# EAGLE board Lipo_Charger_Basic_Panel_v10 (EAGLE 6.6.0), part 1 of 2
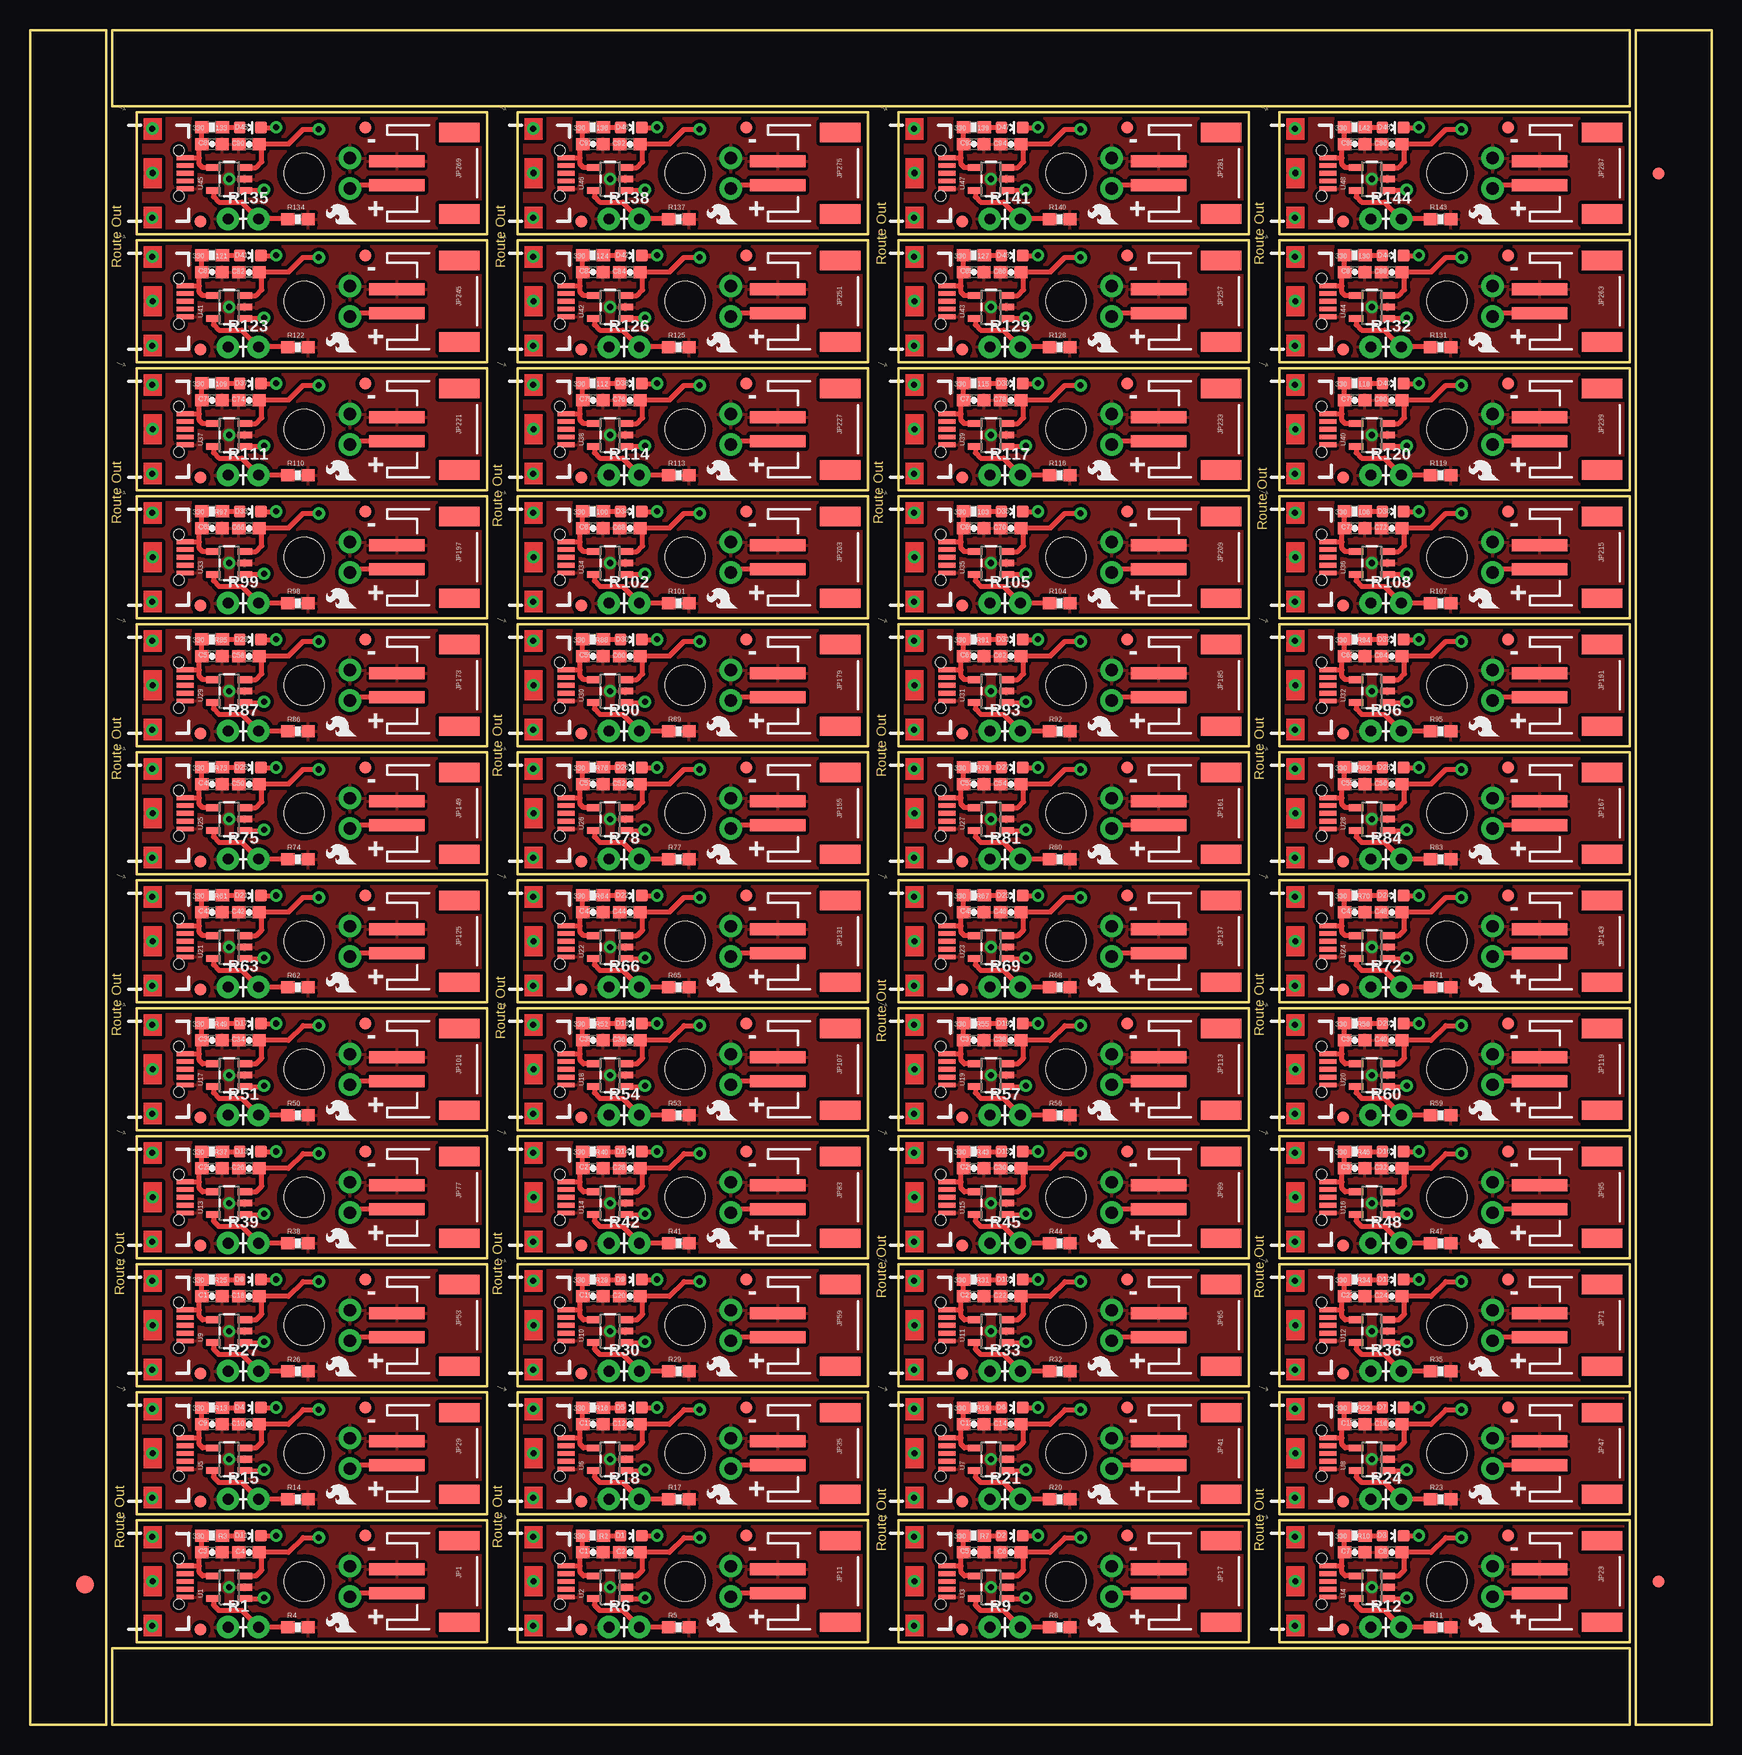
[diagram p0: board, top side]
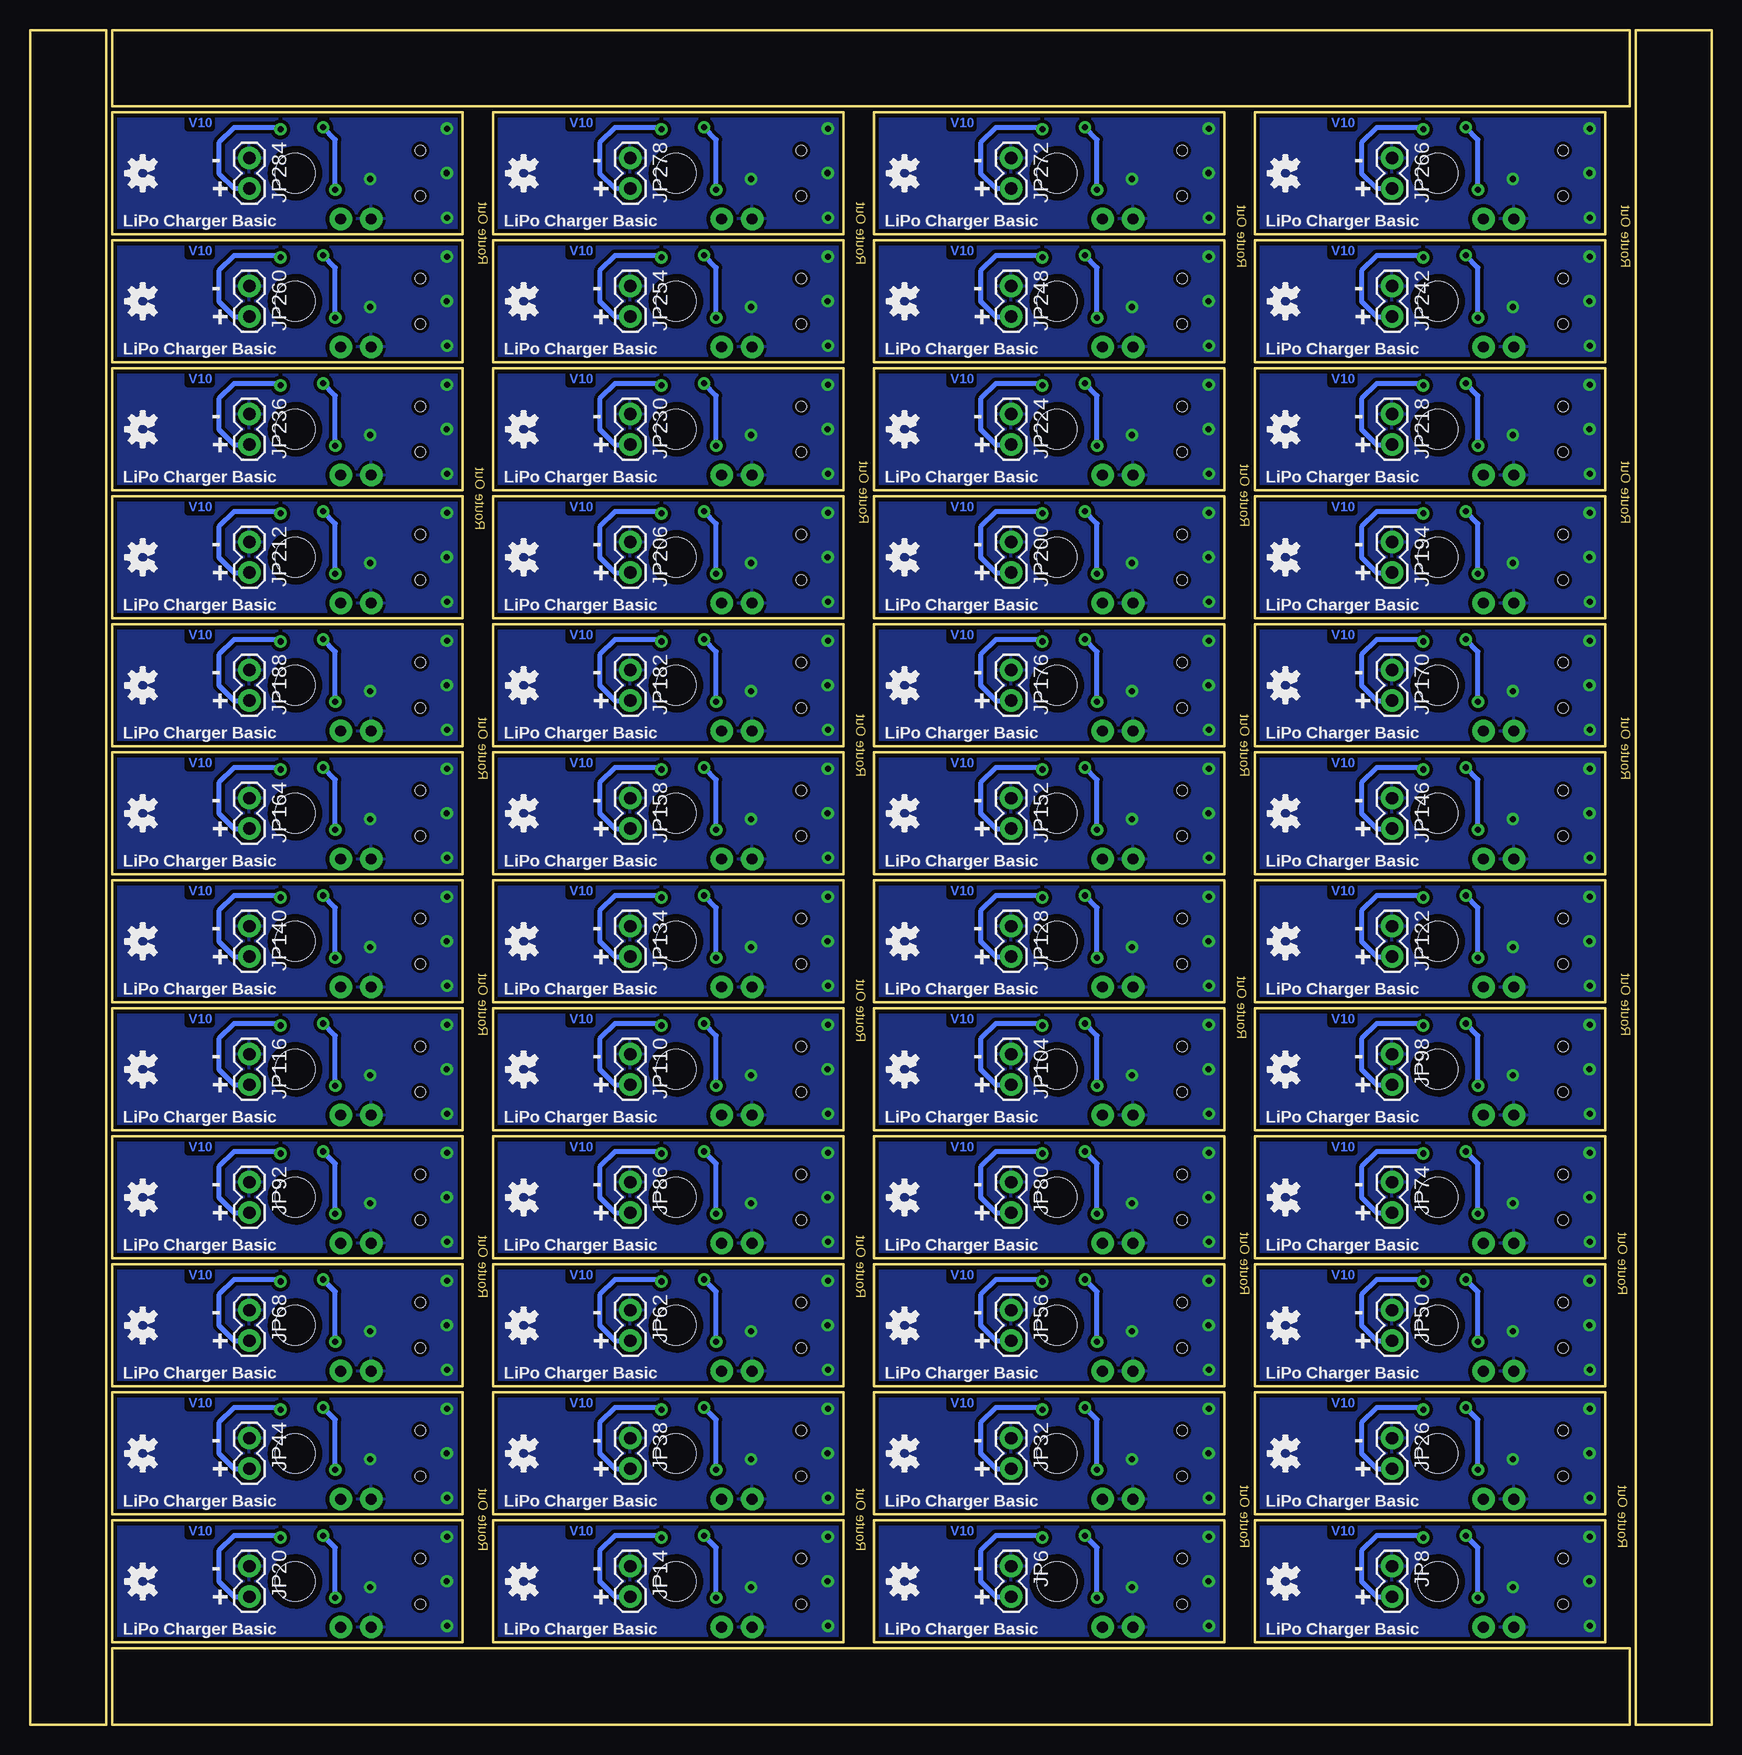
[diagram p1: board, bottom side, seen from below]

Size 140.21 x 141.22 mm. Coordinates in mm from the lower left corner, seen from the top.
Outline: 208 segments
Copper layers (1*16): Top 0.035mm / dielectric 1.5mm / Bottom 0.035mm
Design rules "SparkFun-2-layer": minimum track width 7mil, minimum drill 15mil, track to track 8mil, track to pad 8mil, pad to pad 8mil, via to via 8mil, smd to smd 8mil, copper to edge 8mil, drill to drill 8mil, minimum pad ring 12mil, minimum via ring 10mil, stop-mask expansion 4mil, vias tented up to drill 20mil, thermal gap 10mil

## Footprints (pad centres in the part's own frame; a part is rotated, then mirrored left to right if it is on the bottom)
0603-CAP = smd 1.1 x 1: 1 -0.85,0; 2 0.85,0
LED-0603 = smd 1 x 1: A 0,-0.877; C 0,0.877
FIDUCIAL-1.5X3 = smd 1.5 x 1.5: 1 0,0
FIDUCIAL-1X2 = smd 1 x 1: 1 0,0
JST-2-SMD = smd 1 x 4.6: 1 -1,-3.7; 2 1,-3.7 | smd 1.6 x 3.4: NC1 -3.4,1.5; NC2 3.4,1.5
STAND-OFF = hole 3.302: 0,0
1X02 = drill 1.016 pad 1.88: 1 0,0; 2 2.54,0
USB-AB-MICRO-SMD_V03 = smd 1.4 x 0.4: D+1 2.7,0; D-1 2.7,0.65; GND1 2.7,-1.3; ID1 2.7,-0.65; VBUS1 2.7,1.3 | hole 0.85: 2.2,1.9; 2.2,-1.9
AXIAL-0.1EZ = drill 0.9 pad 1.88: P$1 0,0; P$2 2.54,0
0603-RES = smd 1.1 x 1: 1 -0.85,0; 2 0.85,0
SOT23-5 = smd 0.55 x 1.2: 1 -0.95,-1.3; 2 0,-1.3; 3 0.95,-1.3; 4 0.95,1.3; 5 -0.95,1.3

## Placement (x,y rotation side)
C1  4.7uF  [0603-CAP]  46.93,14.37 0 top
C2  4.7uF  [0603-CAP]  50.02,14.36 180 top
C3  4.7uF  [0603-CAP]  15.18,14.37 0 top
C4  4.7uF  [0603-CAP]  18.27,14.36 180 top
C5  4.7uF  [0603-CAP]  78.68,14.37 0 top
C6  4.7uF  [0603-CAP]  81.77,14.36 180 top
C7  4.7uF  [0603-CAP]  110.43,14.37 0 top
C8  4.7uF  [0603-CAP]  113.52,14.36 180 top
C9  4.7uF  [0603-CAP]  15.18,25.03 0 top
C10  4.7uF  [0603-CAP]  18.27,25.03 180 top
C11  4.7uF  [0603-CAP]  46.93,25.03 0 top
C12  4.7uF  [0603-CAP]  50.02,25.03 180 top
C13  4.7uF  [0603-CAP]  78.68,25.03 0 top
C14  4.7uF  [0603-CAP]  81.77,25.03 180 top
C15  4.7uF  [0603-CAP]  110.43,25.03 0 top
C16  4.7uF  [0603-CAP]  113.52,25.03 180 top
C17  4.7uF  [0603-CAP]  15.18,35.7 0 top
C18  4.7uF  [0603-CAP]  18.27,35.7 180 top
C19  4.7uF  [0603-CAP]  46.93,35.7 0 top
C20  4.7uF  [0603-CAP]  50.02,35.7 180 top
C21  4.7uF  [0603-CAP]  78.68,35.7 0 top
C22  4.7uF  [0603-CAP]  81.77,35.7 180 top
C23  4.7uF  [0603-CAP]  110.43,35.7 0 top
C24  4.7uF  [0603-CAP]  113.52,35.7 180 top
C25  4.7uF  [0603-CAP]  15.18,46.37 0 top
C26  4.7uF  [0603-CAP]  18.27,46.37 180 top
C27  4.7uF  [0603-CAP]  46.93,46.37 0 top
C28  4.7uF  [0603-CAP]  50.02,46.37 180 top
C29  4.7uF  [0603-CAP]  78.68,46.37 0 top
C30  4.7uF  [0603-CAP]  81.77,46.37 180 top
C31  4.7uF  [0603-CAP]  110.43,46.37 0 top
C32  4.7uF  [0603-CAP]  113.52,46.37 180 top
C33  4.7uF  [0603-CAP]  15.18,57.04 0 top
C34  4.7uF  [0603-CAP]  18.27,57.04 180 top
C35  4.7uF  [0603-CAP]  46.93,57.04 0 top
C36  4.7uF  [0603-CAP]  50.02,57.04 180 top
C37  4.7uF  [0603-CAP]  78.68,57.04 0 top
C38  4.7uF  [0603-CAP]  81.77,57.04 180 top
C39  4.7uF  [0603-CAP]  110.43,57.04 0 top
C40  4.7uF  [0603-CAP]  113.52,57.04 180 top
C41  4.7uF  [0603-CAP]  15.18,67.71 0 top
C42  4.7uF  [0603-CAP]  18.27,67.7 180 top
C43  4.7uF  [0603-CAP]  46.93,67.71 0 top
C44  4.7uF  [0603-CAP]  50.02,67.7 180 top
C45  4.7uF  [0603-CAP]  78.68,67.71 0 top
C46  4.7uF  [0603-CAP]  81.77,67.7 180 top
C47  4.7uF  [0603-CAP]  110.43,67.71 0 top
C48  4.7uF  [0603-CAP]  113.52,67.7 180 top
C49  4.7uF  [0603-CAP]  15.18,78.37 0 top
C50  4.7uF  [0603-CAP]  18.27,78.37 180 top
C51  4.7uF  [0603-CAP]  46.93,78.37 0 top
C52  4.7uF  [0603-CAP]  50.02,78.37 180 top
C53  4.7uF  [0603-CAP]  78.68,78.37 0 top
C54  4.7uF  [0603-CAP]  81.77,78.37 180 top
C55  4.7uF  [0603-CAP]  110.43,78.37 0 top
C56  4.7uF  [0603-CAP]  113.52,78.37 180 top
C57  4.7uF  [0603-CAP]  15.18,89.04 0 top
C58  4.7uF  [0603-CAP]  18.27,89.04 180 top
C59  4.7uF  [0603-CAP]  46.93,89.04 0 top
C60  4.7uF  [0603-CAP]  50.02,89.04 180 top
C61  4.7uF  [0603-CAP]  78.68,89.04 0 top
C62  4.7uF  [0603-CAP]  81.77,89.04 180 top
C63  4.7uF  [0603-CAP]  110.43,89.04 0 top
C64  4.7uF  [0603-CAP]  113.52,89.04 180 top
C65  4.7uF  [0603-CAP]  15.18,99.71 0 top
C66  4.7uF  [0603-CAP]  18.27,99.71 180 top
C67  4.7uF  [0603-CAP]  46.93,99.71 0 top
C68  4.7uF  [0603-CAP]  50.02,99.71 180 top
C69  4.7uF  [0603-CAP]  78.68,99.71 0 top
C70  4.7uF  [0603-CAP]  81.77,99.71 180 top
C71  4.7uF  [0603-CAP]  110.43,99.71 0 top
C72  4.7uF  [0603-CAP]  113.52,99.71 180 top
C73  4.7uF  [0603-CAP]  15.18,110.38 0 top
C74  4.7uF  [0603-CAP]  18.27,110.38 180 top
C75  4.7uF  [0603-CAP]  46.93,110.38 0 top
C76  4.7uF  [0603-CAP]  50.02,110.38 180 top
C77  4.7uF  [0603-CAP]  78.68,110.38 0 top
C78  4.7uF  [0603-CAP]  81.77,110.38 180 top
C79  4.7uF  [0603-CAP]  110.43,110.38 0 top
C80  4.7uF  [0603-CAP]  113.52,110.38 180 top
C81  4.7uF  [0603-CAP]  15.18,121.05 0 top
C82  4.7uF  [0603-CAP]  18.27,121.04 180 top
C83  4.7uF  [0603-CAP]  46.93,121.05 0 top
C84  4.7uF  [0603-CAP]  50.02,121.04 180 top
C85  4.7uF  [0603-CAP]  78.68,121.05 0 top
C86  4.7uF  [0603-CAP]  81.77,121.04 180 top
C87  4.7uF  [0603-CAP]  110.43,121.05 0 top
C88  4.7uF  [0603-CAP]  113.52,121.04 180 top
C89  4.7uF  [0603-CAP]  15.18,131.71 0 top
C90  4.7uF  [0603-CAP]  18.27,131.71 180 top
C91  4.7uF  [0603-CAP]  46.93,131.71 0 top
C92  4.7uF  [0603-CAP]  50.02,131.71 180 top
C93  4.7uF  [0603-CAP]  78.68,131.71 0 top
C94  4.7uF  [0603-CAP]  81.77,131.71 180 top
C95  4.7uF  [0603-CAP]  110.43,131.71 0 top
C96  4.7uF  [0603-CAP]  113.52,131.71 180 top
D1  RED  [LED-0603]  50.11,15.75 270 top
D2  RED  [LED-0603]  81.86,15.75 270 top
D3  RED  [LED-0603]  113.61,15.75 270 top
D4  RED  [LED-0603]  18.36,26.42 270 top
D5  RED  [LED-0603]  50.11,26.42 270 top
D6  RED  [LED-0603]  81.86,26.42 270 top
D7  RED  [LED-0603]  113.61,26.42 270 top
D8  RED  [LED-0603]  18.36,37.08 270 top
D9  RED  [LED-0603]  50.11,37.08 270 top
D10  RED  [LED-0603]  81.86,37.08 270 top
D11  RED  [LED-0603]  18.36,15.75 270 top
D12  RED  [LED-0603]  113.61,37.08 270 top
D13  RED  [LED-0603]  18.36,47.75 270 top
D14  RED  [LED-0603]  50.11,47.75 270 top
D15  RED  [LED-0603]  81.86,47.75 270 top
D16  RED  [LED-0603]  113.61,47.75 270 top
D17  RED  [LED-0603]  18.36,58.42 270 top
D18  RED  [LED-0603]  50.11,58.42 270 top
D19  RED  [LED-0603]  81.86,58.42 270 top
D20  RED  [LED-0603]  113.61,58.42 270 top
D21  RED  [LED-0603]  18.36,69.09 270 top
D22  RED  [LED-0603]  50.11,69.09 270 top
D23  RED  [LED-0603]  81.86,69.09 270 top
D24  RED  [LED-0603]  113.61,69.09 270 top
D25  RED  [LED-0603]  18.36,79.76 270 top
D26  RED  [LED-0603]  50.11,79.76 270 top
D27  RED  [LED-0603]  81.86,79.76 270 top
D28  RED  [LED-0603]  113.61,79.76 270 top
D29  RED  [LED-0603]  18.36,90.42 270 top
D30  RED  [LED-0603]  50.11,90.42 270 top
D31  RED  [LED-0603]  81.86,90.42 270 top
D32  RED  [LED-0603]  113.61,90.42 270 top
D33  RED  [LED-0603]  18.36,101.09 270 top
D34  RED  [LED-0603]  50.11,101.09 270 top
D35  RED  [LED-0603]  81.86,101.09 270 top
D36  RED  [LED-0603]  113.61,101.09 270 top
D37  RED  [LED-0603]  18.36,111.76 270 top
D38  RED  [LED-0603]  50.11,111.76 270 top
D39  RED  [LED-0603]  81.86,111.76 270 top
D40  RED  [LED-0603]  113.61,111.76 270 top
D41  RED  [LED-0603]  18.36,122.43 270 top
D42  RED  [LED-0603]  50.11,122.43 270 top
D43  RED  [LED-0603]  81.86,122.43 270 top
D44  RED  [LED-0603]  113.61,122.43 270 top
D45  RED  [LED-0603]  18.36,133.1 270 top
D46  RED  [LED-0603]  50.11,133.1 270 top
D47  RED  [LED-0603]  81.86,133.1 270 top
D48  RED  [LED-0603]  113.61,133.1 270 top
E$1  [FIDUCIAL-1.5X3]  4.57,11.68 0 top
E$5  [FIDUCIAL-1X2]  135.76,129.29 180 top
E$6  [FIDUCIAL-1X2]  135.76,11.94 0 top
JP1  JST  [JST-2-SMD]  34.29,11.94 270 top
JP2  STAND-OFF  [STAND-OFF]  22.86,11.94 0 top
JP3  FIDUCIAL1X2  [FIDUCIAL-1X2]  14.21,7.91 0 top
JP4  FIDUCIAL1X2  [FIDUCIAL-1X2]  27.94,15.75 0 top
JP5  STAND-OFF  [STAND-OFF]  54.61,11.94 0 top
JP6  M02PTH  [1X02]  58.42,13.21 270 bottom
JP7  Micro USB  [USB-AB-MICRO-SMD_V03]  41.98,11.94 0 top
JP8  M02PTH  [1X02]  26.67,13.21 270 bottom
JP9  Micro USB  [USB-AB-MICRO-SMD_V03]  10.23,11.94 0 top
JP10  FIDUCIAL1X2  [FIDUCIAL-1X2]  45.96,7.91 0 top
JP11  JST  [JST-2-SMD]  66.04,11.94 270 top
JP12  FIDUCIAL1X2  [FIDUCIAL-1X2]  59.69,15.75 0 top
JP13  STAND-OFF  [STAND-OFF]  86.36,11.94 0 top
JP14  M02PTH  [1X02]  90.17,13.21 270 bottom
JP15  Micro USB  [USB-AB-MICRO-SMD_V03]  73.73,11.94 0 top
JP16  FIDUCIAL1X2  [FIDUCIAL-1X2]  77.71,7.91 0 top
JP17  JST  [JST-2-SMD]  97.79,11.94 270 top
JP18  FIDUCIAL1X2  [FIDUCIAL-1X2]  91.44,15.75 0 top
JP19  STAND-OFF  [STAND-OFF]  118.11,11.94 0 top
JP20  M02PTH  [1X02]  121.92,13.21 270 bottom
JP21  Micro USB  [USB-AB-MICRO-SMD_V03]  105.48,11.94 0 top
JP22  FIDUCIAL1X2  [FIDUCIAL-1X2]  109.46,7.91 0 top
JP23  JST  [JST-2-SMD]  129.54,11.94 270 top
JP24  FIDUCIAL1X2  [FIDUCIAL-1X2]  123.19,15.75 0 top
JP25  STAND-OFF  [STAND-OFF]  22.86,22.61 0 top
JP26  M02PTH  [1X02]  26.67,23.88 270 bottom
JP27  Micro USB  [USB-AB-MICRO-SMD_V03]  10.23,22.61 0 top
JP28  FIDUCIAL1X2  [FIDUCIAL-1X2]  14.21,18.58 0 top
JP29  JST  [JST-2-SMD]  34.29,22.61 270 top
JP30  FIDUCIAL1X2  [FIDUCIAL-1X2]  27.94,26.42 0 top
JP31  STAND-OFF  [STAND-OFF]  54.61,22.61 0 top
JP32  M02PTH  [1X02]  58.42,23.88 270 bottom
JP33  Micro USB  [USB-AB-MICRO-SMD_V03]  41.98,22.61 0 top
JP34  FIDUCIAL1X2  [FIDUCIAL-1X2]  45.96,18.58 0 top
JP35  JST  [JST-2-SMD]  66.04,22.61 270 top
JP36  FIDUCIAL1X2  [FIDUCIAL-1X2]  59.69,26.42 0 top
JP37  STAND-OFF  [STAND-OFF]  86.36,22.61 0 top
JP38  M02PTH  [1X02]  90.17,23.88 270 bottom
JP39  Micro USB  [USB-AB-MICRO-SMD_V03]  73.73,22.61 0 top
JP40  FIDUCIAL1X2  [FIDUCIAL-1X2]  77.71,18.58 0 top
JP41  JST  [JST-2-SMD]  97.79,22.61 270 top
JP42  FIDUCIAL1X2  [FIDUCIAL-1X2]  91.44,26.42 0 top
JP43  STAND-OFF  [STAND-OFF]  118.11,22.61 0 top
JP44  M02PTH  [1X02]  121.92,23.88 270 bottom
JP45  Micro USB  [USB-AB-MICRO-SMD_V03]  105.48,22.61 0 top
JP46  FIDUCIAL1X2  [FIDUCIAL-1X2]  109.46,18.58 0 top
JP47  JST  [JST-2-SMD]  129.54,22.61 270 top
JP48  FIDUCIAL1X2  [FIDUCIAL-1X2]  123.19,26.42 0 top
JP49  STAND-OFF  [STAND-OFF]  22.86,33.27 0 top
JP50  M02PTH  [1X02]  26.67,34.54 270 bottom
JP51  Micro USB  [USB-AB-MICRO-SMD_V03]  10.23,33.27 0 top
JP52  FIDUCIAL1X2  [FIDUCIAL-1X2]  14.21,29.25 0 top
JP53  JST  [JST-2-SMD]  34.29,33.27 270 top
JP54  FIDUCIAL1X2  [FIDUCIAL-1X2]  27.94,37.08 0 top
JP55  STAND-OFF  [STAND-OFF]  54.61,33.27 0 top
JP56  M02PTH  [1X02]  58.42,34.54 270 bottom
JP57  Micro USB  [USB-AB-MICRO-SMD_V03]  41.98,33.27 0 top
JP58  FIDUCIAL1X2  [FIDUCIAL-1X2]  45.96,29.25 0 top
JP59  JST  [JST-2-SMD]  66.04,33.27 270 top
JP60  FIDUCIAL1X2  [FIDUCIAL-1X2]  59.69,37.08 0 top
JP61  STAND-OFF  [STAND-OFF]  86.36,33.27 0 top
JP62  M02PTH  [1X02]  90.17,34.54 270 bottom
JP63  Micro USB  [USB-AB-MICRO-SMD_V03]  73.73,33.27 0 top
JP64  FIDUCIAL1X2  [FIDUCIAL-1X2]  77.71,29.25 0 top
JP65  JST  [JST-2-SMD]  97.79,33.27 270 top
JP66  FIDUCIAL1X2  [FIDUCIAL-1X2]  91.44,37.08 0 top
JP67  STAND-OFF  [STAND-OFF]  118.11,33.27 0 top
JP68  M02PTH  [1X02]  121.92,34.54 270 bottom
JP69  Micro USB  [USB-AB-MICRO-SMD_V03]  105.48,33.27 0 top
JP70  FIDUCIAL1X2  [FIDUCIAL-1X2]  109.46,29.25 0 top
JP71  JST  [JST-2-SMD]  129.54,33.27 270 top
JP72  FIDUCIAL1X2  [FIDUCIAL-1X2]  123.19,37.08 0 top
JP73  STAND-OFF  [STAND-OFF]  22.86,43.94 0 top
JP74  M02PTH  [1X02]  26.67,45.21 270 bottom
JP75  Micro USB  [USB-AB-MICRO-SMD_V03]  10.23,43.94 0 top
JP76  FIDUCIAL1X2  [FIDUCIAL-1X2]  14.21,39.92 0 top
JP77  JST  [JST-2-SMD]  34.29,43.94 270 top
JP78  FIDUCIAL1X2  [FIDUCIAL-1X2]  27.94,47.75 0 top
JP79  STAND-OFF  [STAND-OFF]  54.61,43.94 0 top
JP80  M02PTH  [1X02]  58.42,45.21 270 bottom
JP81  Micro USB  [USB-AB-MICRO-SMD_V03]  41.98,43.94 0 top
JP82  FIDUCIAL1X2  [FIDUCIAL-1X2]  45.96,39.92 0 top
JP83  JST  [JST-2-SMD]  66.04,43.94 270 top
JP84  FIDUCIAL1X2  [FIDUCIAL-1X2]  59.69,47.75 0 top
JP85  STAND-OFF  [STAND-OFF]  86.36,43.94 0 top
JP86  M02PTH  [1X02]  90.17,45.21 270 bottom
JP87  Micro USB  [USB-AB-MICRO-SMD_V03]  73.73,43.94 0 top
JP88  FIDUCIAL1X2  [FIDUCIAL-1X2]  77.71,39.92 0 top
JP89  JST  [JST-2-SMD]  97.79,43.94 270 top
JP90  FIDUCIAL1X2  [FIDUCIAL-1X2]  91.44,47.75 0 top
JP91  STAND-OFF  [STAND-OFF]  118.11,43.94 0 top
JP92  M02PTH  [1X02]  121.92,45.21 270 bottom
JP93  Micro USB  [USB-AB-MICRO-SMD_V03]  105.48,43.94 0 top
JP94  FIDUCIAL1X2  [FIDUCIAL-1X2]  109.46,39.92 0 top
JP95  JST  [JST-2-SMD]  129.54,43.94 270 top
JP96  FIDUCIAL1X2  [FIDUCIAL-1X2]  123.19,47.75 0 top
JP97  STAND-OFF  [STAND-OFF]  22.86,54.61 0 top
JP98  M02PTH  [1X02]  26.67,55.88 270 bottom
JP99  Micro USB  [USB-AB-MICRO-SMD_V03]  10.23,54.61 0 top
JP100  FIDUCIAL1X2  [FIDUCIAL-1X2]  14.21,50.58 0 top
JP101  JST  [JST-2-SMD]  34.29,54.61 270 top
JP102  FIDUCIAL1X2  [FIDUCIAL-1X2]  27.94,58.42 0 top
JP103  STAND-OFF  [STAND-OFF]  54.61,54.61 0 top
JP104  M02PTH  [1X02]  58.42,55.88 270 bottom
JP105  Micro USB  [USB-AB-MICRO-SMD_V03]  41.98,54.61 0 top
JP106  FIDUCIAL1X2  [FIDUCIAL-1X2]  45.96,50.58 0 top
JP107  JST  [JST-2-SMD]  66.04,54.61 270 top
JP108  FIDUCIAL1X2  [FIDUCIAL-1X2]  59.69,58.42 0 top
JP109  STAND-OFF  [STAND-OFF]  86.36,54.61 0 top
JP110  M02PTH  [1X02]  90.17,55.88 270 bottom
JP111  Micro USB  [USB-AB-MICRO-SMD_V03]  73.73,54.61 0 top
JP112  FIDUCIAL1X2  [FIDUCIAL-1X2]  77.71,50.58 0 top
JP113  JST  [JST-2-SMD]  97.79,54.61 270 top
JP114  FIDUCIAL1X2  [FIDUCIAL-1X2]  91.44,58.42 0 top
JP115  STAND-OFF  [STAND-OFF]  118.11,54.61 0 top
JP116  M02PTH  [1X02]  121.92,55.88 270 bottom
JP117  Micro USB  [USB-AB-MICRO-SMD_V03]  105.48,54.61 0 top
JP118  FIDUCIAL1X2  [FIDUCIAL-1X2]  109.46,50.58 0 top
JP119  JST  [JST-2-SMD]  129.54,54.61 270 top
JP120  FIDUCIAL1X2  [FIDUCIAL-1X2]  123.19,58.42 0 top
JP121  STAND-OFF  [STAND-OFF]  22.86,65.28 0 top
JP122  M02PTH  [1X02]  26.67,66.55 270 bottom
JP123  Micro USB  [USB-AB-MICRO-SMD_V03]  10.23,65.28 0 top
JP124  FIDUCIAL1X2  [FIDUCIAL-1X2]  14.21,61.25 0 top
JP125  JST  [JST-2-SMD]  34.29,65.28 270 top
JP126  FIDUCIAL1X2  [FIDUCIAL-1X2]  27.94,69.09 0 top
JP127  STAND-OFF  [STAND-OFF]  54.61,65.28 0 top
JP128  M02PTH  [1X02]  58.42,66.55 270 bottom
JP129  Micro USB  [USB-AB-MICRO-SMD_V03]  41.98,65.28 0 top
JP130  FIDUCIAL1X2  [FIDUCIAL-1X2]  45.96,61.25 0 top
JP131  JST  [JST-2-SMD]  66.04,65.28 270 top
JP132  FIDUCIAL1X2  [FIDUCIAL-1X2]  59.69,69.09 0 top
JP133  STAND-OFF  [STAND-OFF]  86.36,65.28 0 top
JP134  M02PTH  [1X02]  90.17,66.55 270 bottom
JP135  Micro USB  [USB-AB-MICRO-SMD_V03]  73.73,65.28 0 top
JP136  FIDUCIAL1X2  [FIDUCIAL-1X2]  77.71,61.25 0 top
JP137  JST  [JST-2-SMD]  97.79,65.28 270 top
JP138  FIDUCIAL1X2  [FIDUCIAL-1X2]  91.44,69.09 0 top
JP139  STAND-OFF  [STAND-OFF]  118.11,65.28 0 top
JP140  M02PTH  [1X02]  121.92,66.55 270 bottom
JP141  Micro USB  [USB-AB-MICRO-SMD_V03]  105.48,65.28 0 top
JP142  FIDUCIAL1X2  [FIDUCIAL-1X2]  109.46,61.25 0 top
JP143  JST  [JST-2-SMD]  129.54,65.28 270 top
JP144  FIDUCIAL1X2  [FIDUCIAL-1X2]  123.19,69.09 0 top
JP145  STAND-OFF  [STAND-OFF]  22.86,75.95 0 top
JP146  M02PTH  [1X02]  26.67,77.22 270 bottom
JP147  Micro USB  [USB-AB-MICRO-SMD_V03]  10.23,75.95 0 top
JP148  FIDUCIAL1X2  [FIDUCIAL-1X2]  14.21,71.92 0 top
JP149  JST  [JST-2-SMD]  34.29,75.95 270 top
JP150  FIDUCIAL1X2  [FIDUCIAL-1X2]  27.94,79.76 0 top
JP151  STAND-OFF  [STAND-OFF]  54.61,75.95 0 top
JP152  M02PTH  [1X02]  58.42,77.22 270 bottom
JP153  Micro USB  [USB-AB-MICRO-SMD_V03]  41.98,75.95 0 top
JP154  FIDUCIAL1X2  [FIDUCIAL-1X2]  45.96,71.92 0 top
JP155  JST  [JST-2-SMD]  66.04,75.95 270 top
JP156  FIDUCIAL1X2  [FIDUCIAL-1X2]  59.69,79.76 0 top
JP157  STAND-OFF  [STAND-OFF]  86.36,75.95 0 top
JP158  M02PTH  [1X02]  90.17,77.22 270 bottom
JP159  Micro USB  [USB-AB-MICRO-SMD_V03]  73.73,75.95 0 top
JP160  FIDUCIAL1X2  [FIDUCIAL-1X2]  77.71,71.92 0 top
JP161  JST  [JST-2-SMD]  97.79,75.95 270 top
JP162  FIDUCIAL1X2  [FIDUCIAL-1X2]  91.44,79.76 0 top
JP163  STAND-OFF  [STAND-OFF]  118.11,75.95 0 top
JP164  M02PTH  [1X02]  121.92,77.22 270 bottom
JP165  Micro USB  [USB-AB-MICRO-SMD_V03]  105.48,75.95 0 top
JP166  FIDUCIAL1X2  [FIDUCIAL-1X2]  109.46,71.92 0 top
JP167  JST  [JST-2-SMD]  129.54,75.95 270 top
JP168  FIDUCIAL1X2  [FIDUCIAL-1X2]  123.19,79.76 0 top
JP169  STAND-OFF  [STAND-OFF]  22.86,86.61 0 top
JP170  M02PTH  [1X02]  26.67,87.88 270 bottom
JP171  Micro USB  [USB-AB-MICRO-SMD_V03]  10.23,86.61 0 top
JP172  FIDUCIAL1X2  [FIDUCIAL-1X2]  14.21,82.59 0 top
JP173  JST  [JST-2-SMD]  34.29,86.61 270 top
JP174  FIDUCIAL1X2  [FIDUCIAL-1X2]  27.94,90.42 0 top
JP175  STAND-OFF  [STAND-OFF]  54.61,86.61 0 top
JP176  M02PTH  [1X02]  58.42,87.88 270 bottom
JP177  Micro USB  [USB-AB-MICRO-SMD_V03]  41.98,86.61 0 top
JP178  FIDUCIAL1X2  [FIDUCIAL-1X2]  45.96,82.59 0 top
JP179  JST  [JST-2-SMD]  66.04,86.61 270 top
JP180  FIDUCIAL1X2  [FIDUCIAL-1X2]  59.69,90.42 0 top
JP181  STAND-OFF  [STAND-OFF]  86.36,86.61 0 top
JP182  M02PTH  [1X02]  90.17,87.88 270 bottom
JP183  Micro USB  [USB-AB-MICRO-SMD_V03]  73.73,86.61 0 top
JP184  FIDUCIAL1X2  [FIDUCIAL-1X2]  77.71,82.59 0 top
JP185  JST  [JST-2-SMD]  97.79,86.61 270 top
JP186  FIDUCIAL1X2  [FIDUCIAL-1X2]  91.44,90.42 0 top
JP187  STAND-OFF  [STAND-OFF]  118.11,86.61 0 top
JP188  M02PTH  [1X02]  121.92,87.88 270 bottom
JP189  Micro USB  [USB-AB-MICRO-SMD_V03]  105.48,86.61 0 top
JP190  FIDUCIAL1X2  [FIDUCIAL-1X2]  109.46,82.59 0 top
JP191  JST  [JST-2-SMD]  129.54,86.61 270 top
JP192  FIDUCIAL1X2  [FIDUCIAL-1X2]  123.19,90.42 0 top
JP193  STAND-OFF  [STAND-OFF]  22.86,97.28 0 top
JP194  M02PTH  [1X02]  26.67,98.55 270 bottom
JP195  Micro USB  [USB-AB-MICRO-SMD_V03]  10.23,97.28 0 top
JP196  FIDUCIAL1X2  [FIDUCIAL-1X2]  14.21,93.26 0 top
JP197  JST  [JST-2-SMD]  34.29,97.28 270 top
JP198  FIDUCIAL1X2  [FIDUCIAL-1X2]  27.94,101.09 0 top
JP199  STAND-OFF  [STAND-OFF]  54.61,97.28 0 top
JP200  M02PTH  [1X02]  58.42,98.55 270 bottom
JP201  Micro USB  [USB-AB-MICRO-SMD_V03]  41.98,97.28 0 top
JP202  FIDUCIAL1X2  [FIDUCIAL-1X2]  45.96,93.26 0 top
JP203  JST  [JST-2-SMD]  66.04,97.28 270 top
JP204  FIDUCIAL1X2  [FIDUCIAL-1X2]  59.69,101.09 0 top
JP205  STAND-OFF  [STAND-OFF]  86.36,97.28 0 top
JP206  M02PTH  [1X02]  90.17,98.55 270 bottom
JP207  Micro USB  [USB-AB-MICRO-SMD_V03]  73.73,97.28 0 top
JP208  FIDUCIAL1X2  [FIDUCIAL-1X2]  77.71,93.26 0 top
JP209  JST  [JST-2-SMD]  97.79,97.28 270 top
JP210  FIDUCIAL1X2  [FIDUCIAL-1X2]  91.44,101.09 0 top
JP211  STAND-OFF  [STAND-OFF]  118.11,97.28 0 top
JP212  M02PTH  [1X02]  121.92,98.55 270 bottom
JP213  Micro USB  [USB-AB-MICRO-SMD_V03]  105.48,97.28 0 top
JP214  FIDUCIAL1X2  [FIDUCIAL-1X2]  109.46,93.26 0 top
JP215  JST  [JST-2-SMD]  129.54,97.28 270 top
JP216  FIDUCIAL1X2  [FIDUCIAL-1X2]  123.19,101.09 0 top
JP217  STAND-OFF  [STAND-OFF]  22.86,107.95 0 top
JP218  M02PTH  [1X02]  26.67,109.22 270 bottom
JP219  Micro USB  [USB-AB-MICRO-SMD_V03]  10.23,107.95 0 top
JP220  FIDUCIAL1X2  [FIDUCIAL-1X2]  14.21,103.92 0 top
JP221  JST  [JST-2-SMD]  34.29,107.95 270 top
JP222  FIDUCIAL1X2  [FIDUCIAL-1X2]  27.94,111.76 0 top
JP223  STAND-OFF  [STAND-OFF]  54.61,107.95 0 top
JP224  M02PTH  [1X02]  58.42,109.22 270 bottom
JP225  Micro USB  [USB-AB-MICRO-SMD_V03]  41.98,107.95 0 top
JP226  FIDUCIAL1X2  [FIDUCIAL-1X2]  45.96,103.92 0 top
JP227  JST  [JST-2-SMD]  66.04,107.95 270 top
JP228  FIDUCIAL1X2  [FIDUCIAL-1X2]  59.69,111.76 0 top
JP229  STAND-OFF  [STAND-OFF]  86.36,107.95 0 top
JP230  M02PTH  [1X02]  90.17,109.22 270 bottom
JP231  Micro USB  [USB-AB-MICRO-SMD_V03]  73.73,107.95 0 top
JP232  FIDUCIAL1X2  [FIDUCIAL-1X2]  77.71,103.92 0 top
JP233  JST  [JST-2-SMD]  97.79,107.95 270 top
JP234  FIDUCIAL1X2  [FIDUCIAL-1X2]  91.44,111.76 0 top
JP235  STAND-OFF  [STAND-OFF]  118.11,107.95 0 top
JP236  M02PTH  [1X02]  121.92,109.22 270 bottom
JP237  Micro USB  [USB-AB-MICRO-SMD_V03]  105.48,107.95 0 top
JP238  FIDUCIAL1X2  [FIDUCIAL-1X2]  109.46,103.92 0 top
JP239  JST  [JST-2-SMD]  129.54,107.95 270 top
JP240  FIDUCIAL1X2  [FIDUCIAL-1X2]  123.19,111.76 0 top
JP241  STAND-OFF  [STAND-OFF]  22.86,118.62 0 top
JP242  M02PTH  [1X02]  26.67,119.89 270 bottom
JP243  Micro USB  [USB-AB-MICRO-SMD_V03]  10.23,118.62 0 top
JP244  FIDUCIAL1X2  [FIDUCIAL-1X2]  14.21,114.59 0 top
JP245  JST  [JST-2-SMD]  34.29,118.62 270 top
JP246  FIDUCIAL1X2  [FIDUCIAL-1X2]  27.94,122.43 0 top
JP247  STAND-OFF  [STAND-OFF]  54.61,118.62 0 top
JP248  M02PTH  [1X02]  58.42,119.89 270 bottom
JP249  Micro USB  [USB-AB-MICRO-SMD_V03]  41.98,118.62 0 top
JP250  FIDUCIAL1X2  [FIDUCIAL-1X2]  45.96,114.59 0 top
JP251  JST  [JST-2-SMD]  66.04,118.62 270 top
JP252  FIDUCIAL1X2  [FIDUCIAL-1X2]  59.69,122.43 0 top
JP253  STAND-OFF  [STAND-OFF]  86.36,118.62 0 top
JP254  M02PTH  [1X02]  90.17,119.89 270 bottom
JP255  Micro USB  [USB-AB-MICRO-SMD_V03]  73.73,118.62 0 top
JP256  FIDUCIAL1X2  [FIDUCIAL-1X2]  77.71,114.59 0 top
JP257  JST  [JST-2-SMD]  97.79,118.62 270 top
JP258  FIDUCIAL1X2  [FIDUCIAL-1X2]  91.44,122.43 0 top
JP259  STAND-OFF  [STAND-OFF]  118.11,118.62 0 top
JP260  M02PTH  [1X02]  121.92,119.89 270 bottom
JP261  Micro USB  [USB-AB-MICRO-SMD_V03]  105.48,118.62 0 top
JP262  FIDUCIAL1X2  [FIDUCIAL-1X2]  109.46,114.59 0 top
JP263  JST  [JST-2-SMD]  129.54,118.62 270 top
JP264  FIDUCIAL1X2  [FIDUCIAL-1X2]  123.19,122.43 0 top
JP265  STAND-OFF  [STAND-OFF]  22.86,129.29 0 top
JP266  M02PTH  [1X02]  26.67,130.56 270 bottom
JP267  Micro USB  [USB-AB-MICRO-SMD_V03]  10.23,129.29 0 top
JP268  FIDUCIAL1X2  [FIDUCIAL-1X2]  14.21,125.26 0 top
JP269  JST  [JST-2-SMD]  34.29,129.29 270 top
JP270  FIDUCIAL1X2  [FIDUCIAL-1X2]  27.94,133.1 0 top
JP271  STAND-OFF  [STAND-OFF]  54.61,129.29 0 top
JP272  M02PTH  [1X02]  58.42,130.56 270 bottom
JP273  Micro USB  [USB-AB-MICRO-SMD_V03]  41.98,129.29 0 top
JP274  FIDUCIAL1X2  [FIDUCIAL-1X2]  45.96,125.26 0 top
JP275  JST  [JST-2-SMD]  66.04,129.29 270 top
JP276  FIDUCIAL1X2  [FIDUCIAL-1X2]  59.69,133.1 0 top
JP277  STAND-OFF  [STAND-OFF]  86.36,129.29 0 top
JP278  M02PTH  [1X02]  90.17,130.56 270 bottom
JP279  Micro USB  [USB-AB-MICRO-SMD_V03]  73.73,129.29 0 top
JP280  FIDUCIAL1X2  [FIDUCIAL-1X2]  77.71,125.26 0 top
JP281  JST  [JST-2-SMD]  97.79,129.29 270 top
JP282  FIDUCIAL1X2  [FIDUCIAL-1X2]  91.44,133.1 0 top
JP283  STAND-OFF  [STAND-OFF]  118.11,129.29 0 top
JP284  M02PTH  [1X02]  121.92,130.56 270 bottom
JP285  Micro USB  [USB-AB-MICRO-SMD_V03]  105.48,129.29 0 top
JP286  FIDUCIAL1X2  [FIDUCIAL-1X2]  109.46,125.26 0 top
JP287  JST  [JST-2-SMD]  129.54,129.29 270 top
JP288  FIDUCIAL1X2  [FIDUCIAL-1X2]  123.19,133.1 0 top
LOGO1  OSHW-LOGOS  [OSHW-LOGO-S]  35.56,11.94 90 bottom
LOGO2  SFE_LOGO_FLAME.1_INCH  [SFE_LOGO_FLAME_.1]  27.56,7.37 90 top
LOGO3  OSHW-LOGOS  [OSHW-LOGO-S]  67.31,11.94 90 bottom
LOGO4  SFE_LOGO_FLAME.1_INCH  [SFE_LOGO_FLAME_.1]  59.31,7.37 90 top
LOGO5  OSHW-LOGOS  [OSHW-LOGO-S]  99.06,11.94 90 bottom
LOGO6  SFE_LOGO_FLAME.1_INCH  [SFE_LOGO_FLAME_.1]  91.06,7.37 90 top
LOGO7  OSHW-LOGOS  [OSHW-LOGO-S]  130.81,11.94 90 bottom
LOGO8  SFE_LOGO_FLAME.1_INCH  [SFE_LOGO_FLAME_.1]  122.81,7.37 90 top
LOGO9  OSHW-LOGOS  [OSHW-LOGO-S]  35.56,22.61 90 bottom
LOGO10  SFE_LOGO_FLAME.1_INCH  [SFE_LOGO_FLAME_.1]  27.56,18.03 90 top
LOGO11  OSHW-LOGOS  [OSHW-LOGO-S]  67.31,22.61 90 bottom
LOGO12  SFE_LOGO_FLAME.1_INCH  [SFE_LOGO_FLAME_.1]  59.31,18.03 90 top
LOGO13  OSHW-LOGOS  [OSHW-LOGO-S]  99.06,22.61 90 bottom
LOGO14  SFE_LOGO_FLAME.1_INCH  [SFE_LOGO_FLAME_.1]  91.06,18.03 90 top
LOGO15  OSHW-LOGOS  [OSHW-LOGO-S]  130.81,22.61 90 bottom
LOGO16  SFE_LOGO_FLAME.1_INCH  [SFE_LOGO_FLAME_.1]  122.81,18.03 90 top
LOGO17  OSHW-LOGOS  [OSHW-LOGO-S]  35.56,33.27 90 bottom
LOGO18  SFE_LOGO_FLAME.1_INCH  [SFE_LOGO_FLAME_.1]  27.56,28.7 90 top
LOGO19  OSHW-LOGOS  [OSHW-LOGO-S]  67.31,33.27 90 bottom
LOGO20  SFE_LOGO_FLAME.1_INCH  [SFE_LOGO_FLAME_.1]  59.31,28.7 90 top
LOGO21  OSHW-LOGOS  [OSHW-LOGO-S]  99.06,33.27 90 bottom
LOGO22  SFE_LOGO_FLAME.1_INCH  [SFE_LOGO_FLAME_.1]  91.06,28.7 90 top
LOGO23  OSHW-LOGOS  [OSHW-LOGO-S]  130.81,33.27 90 bottom
LOGO24  SFE_LOGO_FLAME.1_INCH  [SFE_LOGO_FLAME_.1]  122.81,28.7 90 top
LOGO25  OSHW-LOGOS  [OSHW-LOGO-S]  35.56,43.94 90 bottom
LOGO26  SFE_LOGO_FLAME.1_INCH  [SFE_LOGO_FLAME_.1]  27.56,39.37 90 top
LOGO27  OSHW-LOGOS  [OSHW-LOGO-S]  67.31,43.94 90 bottom
LOGO28  SFE_LOGO_FLAME.1_INCH  [SFE_LOGO_FLAME_.1]  59.31,39.37 90 top
LOGO29  OSHW-LOGOS  [OSHW-LOGO-S]  99.06,43.94 90 bottom
LOGO30  SFE_LOGO_FLAME.1_INCH  [SFE_LOGO_FLAME_.1]  91.06,39.37 90 top
LOGO31  OSHW-LOGOS  [OSHW-LOGO-S]  130.81,43.94 90 bottom
LOGO32  SFE_LOGO_FLAME.1_INCH  [SFE_LOGO_FLAME_.1]  122.81,39.37 90 top
LOGO33  OSHW-LOGOS  [OSHW-LOGO-S]  35.56,54.61 90 bottom
LOGO34  SFE_LOGO_FLAME.1_INCH  [SFE_LOGO_FLAME_.1]  27.56,50.04 90 top
LOGO35  OSHW-LOGOS  [OSHW-LOGO-S]  67.31,54.61 90 bottom
LOGO36  SFE_LOGO_FLAME.1_INCH  [SFE_LOGO_FLAME_.1]  59.31,50.04 90 top
LOGO37  OSHW-LOGOS  [OSHW-LOGO-S]  99.06,54.61 90 bottom
LOGO38  SFE_LOGO_FLAME.1_INCH  [SFE_LOGO_FLAME_.1]  91.06,50.04 90 top
LOGO39  OSHW-LOGOS  [OSHW-LOGO-S]  130.81,54.61 90 bottom
LOGO40  SFE_LOGO_FLAME.1_INCH  [SFE_LOGO_FLAME_.1]  122.81,50.04 90 top
LOGO41  OSHW-LOGOS  [OSHW-LOGO-S]  35.56,65.28 90 bottom
LOGO42  SFE_LOGO_FLAME.1_INCH  [SFE_LOGO_FLAME_.1]  27.56,60.71 90 top
LOGO43  OSHW-LOGOS  [OSHW-LOGO-S]  67.31,65.28 90 bottom
LOGO44  SFE_LOGO_FLAME.1_INCH  [SFE_LOGO_FLAME_.1]  59.31,60.71 90 top
LOGO45  OSHW-LOGOS  [OSHW-LOGO-S]  99.06,65.28 90 bottom
LOGO46  SFE_LOGO_FLAME.1_INCH  [SFE_LOGO_FLAME_.1]  91.06,60.71 90 top
LOGO47  OSHW-LOGOS  [OSHW-LOGO-S]  130.81,65.28 90 bottom
LOGO48  SFE_LOGO_FLAME.1_INCH  [SFE_LOGO_FLAME_.1]  122.81,60.71 90 top
LOGO49  OSHW-LOGOS  [OSHW-LOGO-S]  35.56,75.95 90 bottom
LOGO50  SFE_LOGO_FLAME.1_INCH  [SFE_LOGO_FLAME_.1]  27.56,71.37 90 top
LOGO51  OSHW-LOGOS  [OSHW-LOGO-S]  67.31,75.95 90 bottom
LOGO52  SFE_LOGO_FLAME.1_INCH  [SFE_LOGO_FLAME_.1]  59.31,71.37 90 top
LOGO53  OSHW-LOGOS  [OSHW-LOGO-S]  99.06,75.95 90 bottom
LOGO54  SFE_LOGO_FLAME.1_INCH  [SFE_LOGO_FLAME_.1]  91.06,71.37 90 top
LOGO55  OSHW-LOGOS  [OSHW-LOGO-S]  130.81,75.95 90 bottom
LOGO56  SFE_LOGO_FLAME.1_INCH  [SFE_LOGO_FLAME_.1]  122.81,71.37 90 top
LOGO57  OSHW-LOGOS  [OSHW-LOGO-S]  35.56,86.61 90 bottom
LOGO58  SFE_LOGO_FLAME.1_INCH  [SFE_LOGO_FLAME_.1]  27.56,82.04 90 top
LOGO59  OSHW-LOGOS  [OSHW-LOGO-S]  67.31,86.61 90 bottom
LOGO60  SFE_LOGO_FLAME.1_INCH  [SFE_LOGO_FLAME_.1]  59.31,82.04 90 top
LOGO61  OSHW-LOGOS  [OSHW-LOGO-S]  99.06,86.61 90 bottom
LOGO62  SFE_LOGO_FLAME.1_INCH  [SFE_LOGO_FLAME_.1]  91.06,82.04 90 top
LOGO63  OSHW-LOGOS  [OSHW-LOGO-S]  130.81,86.61 90 bottom
LOGO64  SFE_LOGO_FLAME.1_INCH  [SFE_LOGO_FLAME_.1]  122.81,82.04 90 top
LOGO65  OSHW-LOGOS  [OSHW-LOGO-S]  35.56,97.28 90 bottom
LOGO66  SFE_LOGO_FLAME.1_INCH  [SFE_LOGO_FLAME_.1]  27.56,92.71 90 top
LOGO67  OSHW-LOGOS  [OSHW-LOGO-S]  67.31,97.28 90 bottom
LOGO68  SFE_LOGO_FLAME.1_INCH  [SFE_LOGO_FLAME_.1]  59.31,92.71 90 top
LOGO69  OSHW-LOGOS  [OSHW-LOGO-S]  99.06,97.28 90 bottom
LOGO70  SFE_LOGO_FLAME.1_INCH  [SFE_LOGO_FLAME_.1]  91.06,92.71 90 top
LOGO71  OSHW-LOGOS  [OSHW-LOGO-S]  130.81,97.28 90 bottom
LOGO72  SFE_LOGO_FLAME.1_INCH  [SFE_LOGO_FLAME_.1]  122.81,92.71 90 top
LOGO73  OSHW-LOGOS  [OSHW-LOGO-S]  35.56,107.95 90 bottom
LOGO74  SFE_LOGO_FLAME.1_INCH  [SFE_LOGO_FLAME_.1]  27.56,103.38 90 top
LOGO75  OSHW-LOGOS  [OSHW-LOGO-S]  67.31,107.95 90 bottom
LOGO76  SFE_LOGO_FLAME.1_INCH  [SFE_LOGO_FLAME_.1]  59.31,103.38 90 top
LOGO77  OSHW-LOGOS  [OSHW-LOGO-S]  99.06,107.95 90 bottom
LOGO78  SFE_LOGO_FLAME.1_INCH  [SFE_LOGO_FLAME_.1]  91.06,103.38 90 top
LOGO79  OSHW-LOGOS  [OSHW-LOGO-S]  130.81,107.95 90 bottom
LOGO80  SFE_LOGO_FLAME.1_INCH  [SFE_LOGO_FLAME_.1]  122.81,103.38 90 top
LOGO81  OSHW-LOGOS  [OSHW-LOGO-S]  35.56,118.62 90 bottom
LOGO82  SFE_LOGO_FLAME.1_INCH  [SFE_LOGO_FLAME_.1]  27.56,114.05 90 top
LOGO83  OSHW-LOGOS  [OSHW-LOGO-S]  67.31,118.62 90 bottom
LOGO84  SFE_LOGO_FLAME.1_INCH  [SFE_LOGO_FLAME_.1]  59.31,114.05 90 top
LOGO85  OSHW-LOGOS  [OSHW-LOGO-S]  99.06,118.62 90 bottom
LOGO86  SFE_LOGO_FLAME.1_INCH  [SFE_LOGO_FLAME_.1]  91.06,114.05 90 top
LOGO87  OSHW-LOGOS  [OSHW-LOGO-S]  130.81,118.62 90 bottom
LOGO88  SFE_LOGO_FLAME.1_INCH  [SFE_LOGO_FLAME_.1]  122.81,114.05 90 top
LOGO89  OSHW-LOGOS  [OSHW-LOGO-S]  35.56,129.29 90 bottom
LOGO90  SFE_LOGO_FLAME.1_INCH  [SFE_LOGO_FLAME_.1]  27.56,124.71 90 top
LOGO91  OSHW-LOGOS  [OSHW-LOGO-S]  67.31,129.29 90 bottom
LOGO92  SFE_LOGO_FLAME.1_INCH  [SFE_LOGO_FLAME_.1]  59.31,124.71 90 top
LOGO93  OSHW-LOGOS  [OSHW-LOGO-S]  99.06,129.29 90 bottom
LOGO94  SFE_LOGO_FLAME.1_INCH  [SFE_LOGO_FLAME_.1]  91.06,124.71 90 top
LOGO95  OSHW-LOGOS  [OSHW-LOGO-S]  130.81,129.29 90 bottom
LOGO96  SFE_LOGO_FLAME.1_INCH  [SFE_LOGO_FLAME_.1]  122.81,124.71 90 top
R1  [AXIAL-0.1EZ]  16.51,8.13 0 top
R2  330  [0603-RES]  46.93,15.76 180 top
R3  330  [0603-RES]  15.18,15.76 180 top
R4  2.0k  [0603-RES]  22.34,8.12 0 top
R5  2.0k  [0603-RES]  54.09,8.12 0 top
R6  [AXIAL-0.1EZ]  48.26,8.13 0 top
R7  330  [0603-RES]  78.68,15.76 180 top
R8  2.0k  [0603-RES]  85.84,8.12 0 top
R9  [AXIAL-0.1EZ]  80.01,8.13 0 top
R10  330  [0603-RES]  110.43,15.76 180 top
R11  2.0k  [0603-RES]  117.59,8.12 0 top
R12  [AXIAL-0.1EZ]  111.76,8.13 0 top
R13  330  [0603-RES]  15.18,26.43 180 top
R14  2.0k  [0603-RES]  22.34,18.78 0 top
R15  [AXIAL-0.1EZ]  16.51,18.8 0 top
R16  330  [0603-RES]  46.93,26.43 180 top
R17  2.0k  [0603-RES]  54.09,18.78 0 top
R18  [AXIAL-0.1EZ]  48.26,18.8 0 top
R19  330  [0603-RES]  78.68,26.43 180 top
R20  2.0k  [0603-RES]  85.84,18.78 0 top
R21  [AXIAL-0.1EZ]  80.01,18.8 0 top
R22  330  [0603-RES]  110.43,26.43 180 top
R23  2.0k  [0603-RES]  117.59,18.78 0 top
R24  [AXIAL-0.1EZ]  111.76,18.8 0 top
R25  330  [0603-RES]  15.18,37.1 180 top
R26  2.0k  [0603-RES]  22.34,29.45 0 top
R27  [AXIAL-0.1EZ]  16.51,29.46 0 top
R28  330  [0603-RES]  46.93,37.1 180 top
R29  2.0k  [0603-RES]  54.09,29.45 0 top
R30  [AXIAL-0.1EZ]  48.26,29.46 0 top
R31  330  [0603-RES]  78.68,37.1 180 top
R32  2.0k  [0603-RES]  85.84,29.45 0 top
R33  [AXIAL-0.1EZ]  80.01,29.46 0 top
R34  330  [0603-RES]  110.43,37.1 180 top
R35  2.0k  [0603-RES]  117.59,29.45 0 top
R36  [AXIAL-0.1EZ]  111.76,29.46 0 top
R37  330  [0603-RES]  15.18,47.76 180 top
R38  2.0k  [0603-RES]  22.34,40.12 0 top
R39  [AXIAL-0.1EZ]  16.51,40.13 0 top
R40  330  [0603-RES]  46.93,47.76 180 top
R41  2.0k  [0603-RES]  54.09,40.12 0 top
R42  [AXIAL-0.1EZ]  48.26,40.13 0 top
R43  330  [0603-RES]  78.68,47.76 180 top
R44  2.0k  [0603-RES]  85.84,40.12 0 top
R45  [AXIAL-0.1EZ]  80.01,40.13 0 top
R46  330  [0603-RES]  110.43,47.76 180 top
R47  2.0k  [0603-RES]  117.59,40.12 0 top
R48  [AXIAL-0.1EZ]  111.76,40.13 0 top
R49  330  [0603-RES]  15.18,58.43 180 top
R50  2.0k  [0603-RES]  22.34,50.79 0 top
R51  [AXIAL-0.1EZ]  16.51,50.8 0 top
R52  330  [0603-RES]  46.93,58.43 180 top
R53  2.0k  [0603-RES]  54.09,50.79 0 top
R54  [AXIAL-0.1EZ]  48.26,50.8 0 top
R55  330  [0603-RES]  78.68,58.43 180 top
R56  2.0k  [0603-RES]  85.84,50.79 0 top
R57  [AXIAL-0.1EZ]  80.01,50.8 0 top
R58  330  [0603-RES]  110.43,58.43 180 top
R59  2.0k  [0603-RES]  117.59,50.79 0 top
R60  [AXIAL-0.1EZ]  111.76,50.8 0 top
R61  330  [0603-RES]  15.18,69.1 180 top
R62  2.0k  [0603-RES]  22.34,61.46 0 top
R63  [AXIAL-0.1EZ]  16.51,61.47 0 top
R64  330  [0603-RES]  46.93,69.1 180 top
R65  2.0k  [0603-RES]  54.09,61.46 0 top
R66  [AXIAL-0.1EZ]  48.26,61.47 0 top
R67  330  [0603-RES]  78.68,69.1 180 top
R68  2.0k  [0603-RES]  85.84,61.46 0 top
R69  [AXIAL-0.1EZ]  80.01,61.47 0 top
R70  330  [0603-RES]  110.43,69.1 180 top
R71  2.0k  [0603-RES]  117.59,61.46 0 top
R72  [AXIAL-0.1EZ]  111.76,61.47 0 top
R73  330  [0603-RES]  15.18,79.77 180 top
R74  2.0k  [0603-RES]  22.34,72.12 0 top
R75  [AXIAL-0.1EZ]  16.51,72.14 0 top
R76  330  [0603-RES]  46.93,79.77 180 top
R77  2.0k  [0603-RES]  54.09,72.12 0 top
R78  [AXIAL-0.1EZ]  48.26,72.14 0 top
R79  330  [0603-RES]  78.68,79.77 180 top
R80  2.0k  [0603-RES]  85.84,72.12 0 top
R81  [AXIAL-0.1EZ]  80.01,72.14 0 top
R82  330  [0603-RES]  110.43,79.77 180 top
R83  2.0k  [0603-RES]  117.59,72.12 0 top
R84  [AXIAL-0.1EZ]  111.76,72.14 0 top
R85  330  [0603-RES]  15.18,90.44 180 top
R86  2.0k  [0603-RES]  22.34,82.79 0 top
R87  [AXIAL-0.1EZ]  16.51,82.8 0 top
R88  330  [0603-RES]  46.93,90.44 180 top
R89  2.0k  [0603-RES]  54.09,82.79 0 top
R90  [AXIAL-0.1EZ]  48.26,82.8 0 top
R91  330  [0603-RES]  78.68,90.44 180 top
R92  2.0k  [0603-RES]  85.84,82.79 0 top
R93  [AXIAL-0.1EZ]  80.01,82.8 0 top
R94  330  [0603-RES]  110.43,90.44 180 top
R95  2.0k  [0603-RES]  117.59,82.79 0 top
R96  [AXIAL-0.1EZ]  111.76,82.8 0 top
R97  330  [0603-RES]  15.18,101.1 180 top
R98  2.0k  [0603-RES]  22.34,93.46 0 top
R99  [AXIAL-0.1EZ]  16.51,93.47 0 top
R100  330  [0603-RES]  46.93,101.1 180 top
R101  2.0k  [0603-RES]  54.09,93.46 0 top
R102  [AXIAL-0.1EZ]  48.26,93.47 0 top
R103  330  [0603-RES]  78.68,101.1 180 top
R104  2.0k  [0603-RES]  85.84,93.46 0 top
R105  [AXIAL-0.1EZ]  80.01,93.47 0 top
R106  330  [0603-RES]  110.43,101.1 180 top
R107  2.0k  [0603-RES]  117.59,93.46 0 top
R108  [AXIAL-0.1EZ]  111.76,93.47 0 top
R109  330  [0603-RES]  15.18,111.77 180 top
R110  2.0k  [0603-RES]  22.34,104.13 0 top
R111  [AXIAL-0.1EZ]  16.51,104.14 0 top
R112  330  [0603-RES]  46.93,111.77 180 top
R113  2.0k  [0603-RES]  54.09,104.13 0 top
R114  [AXIAL-0.1EZ]  48.26,104.14 0 top
R115  330  [0603-RES]  78.68,111.77 180 top
R116  2.0k  [0603-RES]  85.84,104.13 0 top
R117  [AXIAL-0.1EZ]  80.01,104.14 0 top
R118  330  [0603-RES]  110.43,111.77 180 top
R119  2.0k  [0603-RES]  117.59,104.13 0 top
R120  [AXIAL-0.1EZ]  111.76,104.14 0 top
R121  330  [0603-RES]  15.18,122.44 180 top
R122  2.0k  [0603-RES]  22.34,114.8 0 top
R123  [AXIAL-0.1EZ]  16.51,114.81 0 top
R124  330  [0603-RES]  46.93,122.44 180 top
R125  2.0k  [0603-RES]  54.09,114.8 0 top
R126  [AXIAL-0.1EZ]  48.26,114.81 0 top
R127  330  [0603-RES]  78.68,122.44 180 top
R128  2.0k  [0603-RES]  85.84,114.8 0 top
R129  [AXIAL-0.1EZ]  80.01,114.81 0 top
R130  330  [0603-RES]  110.43,122.44 180 top
R131  2.0k  [0603-RES]  117.59,114.8 0 top
R132  [AXIAL-0.1EZ]  111.76,114.81 0 top
R133  330  [0603-RES]  15.18,133.11 180 top
R134  2.0k  [0603-RES]  22.34,125.46 0 top
R135  [AXIAL-0.1EZ]  16.51,125.48 0 top
R136  330  [0603-RES]  46.93,133.11 180 top
R137  2.0k  [0603-RES]  54.09,125.46 0 top
R138  [AXIAL-0.1EZ]  48.26,125.48 0 top
R139  330  [0603-RES]  78.68,133.11 180 top
R140  2.0k  [0603-RES]  85.84,125.46 0 top
R141  [AXIAL-0.1EZ]  80.01,125.48 0 top
R142  330  [0603-RES]  110.43,133.11 180 top
R143  2.0k  [0603-RES]  117.59,125.46 0 top
R144  [AXIAL-0.1EZ]  111.76,125.48 0 top
U1  MCP73831  [SOT23-5]  16.6,11.46 90 top
U2  MCP73831  [SOT23-5]  48.35,11.46 90 top
U3  MCP73831  [SOT23-5]  80.1,11.46 90 top
U4  MCP73831  [SOT23-5]  111.85,11.46 90 top
U5  MCP73831  [SOT23-5]  16.6,22.12 90 top
U6  MCP73831  [SOT23-5]  48.35,22.12 90 top
U7  MCP73831  [SOT23-5]  80.1,22.12 90 top
U8  MCP73831  [SOT23-5]  111.85,22.12 90 top
U9  MCP73831  [SOT23-5]  16.6,32.79 90 top
U10  MCP73831  [SOT23-5]  48.35,32.79 90 top
U11  MCP73831  [SOT23-5]  80.1,32.79 90 top
U12  MCP73831  [SOT23-5]  111.85,32.79 90 top
U13  MCP73831  [SOT23-5]  16.6,43.46 90 top
U14  MCP73831  [SOT23-5]  48.35,43.46 90 top
U15  MCP73831  [SOT23-5]  80.1,43.46 90 top
U16  MCP73831  [SOT23-5]  111.85,43.46 90 top
U17  MCP73831  [SOT23-5]  16.6,54.13 90 top
U18  MCP73831  [SOT23-5]  48.35,54.13 90 top
U19  MCP73831  [SOT23-5]  80.1,54.13 90 top
U20  MCP73831  [SOT23-5]  111.85,54.13 90 top
U21  MCP73831  [SOT23-5]  16.6,64.8 90 top
U22  MCP73831  [SOT23-5]  48.35,64.8 90 top
U23  MCP73831  [SOT23-5]  80.1,64.8 90 top
U24  MCP73831  [SOT23-5]  111.85,64.8 90 top
U25  MCP73831  [SOT23-5]  16.6,75.46 90 top
U26  MCP73831  [SOT23-5]  48.35,75.46 90 top
U27  MCP73831  [SOT23-5]  80.1,75.46 90 top
U28  MCP73831  [SOT23-5]  111.85,75.46 90 top
U29  MCP73831  [SOT23-5]  16.6,86.13 90 top
U30  MCP73831  [SOT23-5]  48.35,86.13 90 top
U31  MCP73831  [SOT23-5]  80.1,86.13 90 top
U32  MCP73831  [SOT23-5]  111.85,86.13 90 top
U33  MCP73831  [SOT23-5]  16.6,96.8 90 top
U34  MCP73831  [SOT23-5]  48.35,96.8 90 top
U35  MCP73831  [SOT23-5]  80.1,96.8 90 top
U36  MCP73831  [SOT23-5]  111.85,96.8 90 top
U37  MCP73831  [SOT23-5]  16.6,107.47 90 top
U38  MCP73831  [SOT23-5]  48.35,107.47 90 top
U39  MCP73831  [SOT23-5]  80.1,107.47 90 top
U40  MCP73831  [SOT23-5]  111.85,107.47 90 top
U41  MCP73831  [SOT23-5]  16.6,118.14 90 top
U42  MCP73831  [SOT23-5]  48.35,118.14 90 top
U43  MCP73831  [SOT23-5]  80.1,118.14 90 top
U44  MCP73831  [SOT23-5]  111.85,118.14 90 top
U45  MCP73831  [SOT23-5]  16.6,128.8 90 top
U46  MCP73831  [SOT23-5]  48.35,128.8 90 top
U47  MCP73831  [SOT23-5]  80.1,128.8 90 top
U48  MCP73831  [SOT23-5]  111.85,128.8 90 top

## Library data of the parts
C1-C96 = SparkFun-Capacitors; PROD_ID: CAP-08280
D1-D48 = SparkFun-LED; PROD_ID: DIO-00819
E$1 = SparkFun-Retired
E$5 E$6 LOGO1-LOGO96 = SparkFun-Aesthetics
JP1 JP11 JP17 JP23 JP29 JP35 JP41 JP47 JP53 JP59 JP65 JP71 JP77 JP83 JP89 JP95 JP101 JP107 JP113 JP119 JP125 JP131 JP137 JP143 JP149 JP155 JP161 JP167 JP173 JP179 JP185 JP191 JP197 JP203 JP209 JP215 JP221 JP227 JP233 JP239 JP245 JP251 JP257 JP263 JP269 JP275 JP281 JP287 = SparkFun-Connectors; PROD_ID: CONN-08352
JP2-JP5 JP10 JP12 JP13 JP16 JP18 JP19 JP22 JP24 JP25 JP28 JP30 JP31 JP34 JP36 JP37 JP40 JP42 JP43 JP46 JP48 JP49 JP52 JP54 JP55 JP58 JP60 JP61 JP64 JP66 JP67 JP70 JP72 JP73 JP76 JP78 JP79 JP82 JP84 JP85 JP88 JP90 JP91 JP94 JP96 JP97 JP100 JP102 JP103 JP106 JP108 JP109 JP112 JP114 JP115 JP118 JP120 JP121 JP124 JP126 JP127 JP130 JP132 JP133 JP136 JP138 JP139 JP142 JP144 JP145 JP148 JP150 JP151 JP154 JP156 JP157 JP160 JP162 JP163 JP166 JP168 JP169 JP172 JP174 JP175 JP178 JP180 JP181 JP184 JP186 JP187 JP190 JP192 JP193 JP196 JP198 JP199 JP202 JP204 JP205 JP208 JP210 JP211 JP214 JP216 JP217 JP220 JP222 JP223 JP226 JP228 JP229 JP232 JP234 JP235 JP238 JP240 JP241 JP244 JP246 JP247 JP250 JP252 JP253 JP256 JP258 JP259 JP262 JP264 JP265 JP268 JP270 JP271 JP274 JP276 JP277 JP280 JP282 JP283 JP286 JP288 = SparkFun
JP6 JP8 JP14 JP20 JP26 JP32 JP38 JP44 JP50 JP56 JP62 JP68 JP74 JP80 JP86 JP92 JP98 JP104 JP110 JP116 JP122 JP128 JP134 JP140 JP146 JP152 JP158 JP164 JP170 JP176 JP182 JP188 JP194 JP200 JP206 JP212 JP218 JP224 JP230 JP236 JP242 JP248 JP254 JP260 JP266 JP272 JP278 JP284 = SparkFun-Connectors
JP7 JP9 JP15 JP21 JP27 JP33 JP39 JP45 JP51 JP57 JP63 JP69 JP75 JP81 JP87 JP93 JP99 JP105 JP111 JP117 JP123 JP129 JP135 JP141 JP147 JP153 JP159 JP165 JP171 JP177 JP183 JP189 JP195 JP201 JP207 JP213 JP219 JP225 JP231 JP237 JP243 JP249 JP255 JP261 JP267 JP273 JP279 JP285 = SparkFun-Connectors; PROD_ID: CONN-11794
R1 R6 R9 R12 R15 R18 R21 R24 R27 R30 R33 R36 R39 R42 R45 R48 R51 R54 R57 R60 R63 R66 R69 R72 R75 R78 R81 R84 R87 R90 R93 R96 R99 R102 R105 R108 R111 R114 R117 R120 R123 R126 R129 R132 R135 R138 R141 R144 = SparkFun-Resistors
R2 R3 R7 R10 R13 R16 R19 R22 R25 R28 R31 R34 R37 R40 R43 R46 R49 R52 R55 R58 R61 R64 R67 R70 R73 R76 R79 R82 R85 R88 R91 R94 R97 R100 R103 R106 R109 R112 R115 R118 R121 R124 R127 R130 R133 R136 R139 R142 = SparkFun-Resistors; PROD_ID: RES-00818
R4 R5 R8 R11 R14 R17 R20 R23 R26 R29 R32 R35 R38 R41 R44 R47 R50 R53 R56 R59 R62 R65 R68 R71 R74 R77 R80 R83 R86 R89 R92 R95 R98 R101 R104 R107 R110 R113 R116 R119 R122 R125 R128 R131 R134 R137 R140 R143 = SparkFun-Resistors; PROD_ID: RES-08296
U1-U48 = SparkFun-PowerIC; PROD_ID: IC-09995

## Nets
GND: C3.2 C4.2 JP1.1 JP8.1 JP9.GND1 R1.P$1 R4.2 U1.2
GND1: C1.2 C2.2 JP6.1 JP7.GND1 JP11.1 R5.2 R6.P$1 U2.2
GND2: C5.2 C6.2 JP14.1 JP15.GND1 JP17.1 R8.2 R9.P$1 U3.2
GND3: C7.2 C8.2 JP20.1 JP21.GND1 JP23.1 R11.2 R12.P$1 U4.2
GND4: C9.2 C10.2 JP26.1 JP27.GND1 JP29.1 R14.2 R15.P$1 U5.2
GND5: C11.2 C12.2 JP32.1 JP33.GND1 JP35.1 R17.2 R18.P$1 U6.2
GND6: C13.2 C14.2 JP38.1 JP39.GND1 JP41.1 R20.2 R21.P$1 U7.2
GND7: C15.2 C16.2 JP44.1 JP45.GND1 JP47.1 R23.2 R24.P$1 U8.2
GND8: C17.2 C18.2 JP50.1 JP51.GND1 JP53.1 R26.2 R27.P$1 U9.2
GND9: C19.2 C20.2 JP56.1 JP57.GND1 JP59.1 R29.2 R30.P$1 U10.2
GND10: C21.2 C22.2 JP62.1 JP63.GND1 JP65.1 R32.2 R33.P$1 U11.2
GND11: C23.2 C24.2 JP68.1 JP69.GND1 JP71.1 R35.2 R36.P$1 U12.2
GND12: C25.2 C26.2 JP74.1 JP75.GND1 JP77.1 R38.2 R39.P$1 U13.2
GND13: C27.2 C28.2 JP80.1 JP81.GND1 JP83.1 R41.2 R42.P$1 U14.2
GND14: C29.2 C30.2 JP86.1 JP87.GND1 JP89.1 R44.2 R45.P$1 U15.2
GND15: C31.2 C32.2 JP92.1 JP93.GND1 JP95.1 R47.2 R48.P$1 U16.2
GND16: C33.2 C34.2 JP98.1 JP99.GND1 JP101.1 R50.2 R51.P$1 U17.2
GND17: C35.2 C36.2 JP104.1 JP105.GND1 JP107.1 R53.2 R54.P$1 U18.2
GND18: C37.2 C38.2 JP110.1 JP111.GND1 JP113.1 R56.2 R57.P$1 U19.2
GND19: C39.2 C40.2 JP116.1 JP117.GND1 JP119.1 R59.2 R60.P$1 U20.2
GND20: C41.2 C42.2 JP122.1 JP123.GND1 JP125.1 R62.2 R63.P$1 U21.2
GND21: C43.2 C44.2 JP128.1 JP129.GND1 JP131.1 R65.2 R66.P$1 U22.2
GND22: C45.2 C46.2 JP134.1 JP135.GND1 JP137.1 R68.2 R69.P$1 U23.2
GND23: C47.2 C48.2 JP140.1 JP141.GND1 JP143.1 R71.2 R72.P$1 U24.2
GND24: C49.2 C50.2 JP146.1 JP147.GND1 JP149.1 R74.2 R75.P$1 U25.2
GND25: C51.2 C52.2 JP152.1 JP153.GND1 JP155.1 R77.2 R78.P$1 U26.2
GND26: C53.2 C54.2 JP158.1 JP159.GND1 JP161.1 R80.2 R81.P$1 U27.2
GND27: C55.2 C56.2 JP164.1 JP165.GND1 JP167.1 R83.2 R84.P$1 U28.2
GND28: C57.2 C58.2 JP170.1 JP171.GND1 JP173.1 R86.2 R87.P$1 U29.2
GND29: C59.2 C60.2 JP176.1 JP177.GND1 JP179.1 R89.2 R90.P$1 U30.2
GND30: C61.2 C62.2 JP182.1 JP183.GND1 JP185.1 R92.2 R93.P$1 U31.2
GND31: C63.2 C64.2 JP188.1 JP189.GND1 JP191.1 R95.2 R96.P$1 U32.2
GND32: C65.2 C66.2 JP194.1 JP195.GND1 JP197.1 R98.2 R99.P$1 U33.2
GND33: C67.2 C68.2 JP200.1 JP201.GND1 JP203.1 R101.2 R102.P$1 U34.2
GND34: C69.2 C70.2 JP206.1 JP207.GND1 JP209.1 R104.2 R105.P$1 U35.2
GND35: C71.2 C72.2 JP212.1 JP213.GND1 JP215.1 R107.2 R108.P$1 U36.2
GND36: C73.2 C74.2 JP218.1 JP219.GND1 JP221.1 R110.2 R111.P$1 U37.2
GND37: C75.2 C76.2 JP224.1 JP225.GND1 JP227.1 R113.2 R114.P$1 U38.2
GND38: C77.2 C78.2 JP230.1 JP231.GND1 JP233.1 R116.2 R117.P$1 U39.2
GND39: C79.2 C80.2 JP236.1 JP237.GND1 JP239.1 R119.2 R120.P$1 U40.2
GND40: C81.2 C82.2 JP242.1 JP243.GND1 JP245.1 R122.2 R123.P$1 U41.2
GND41: C83.2 C84.2 JP248.1 JP249.GND1 JP251.1 R125.2 R126.P$1 U42.2
GND42: C85.2 C86.2 JP254.1 JP255.GND1 JP257.1 R128.2 R129.P$1 U43.2
GND43: C87.2 C88.2 JP260.1 JP261.GND1 JP263.1 R131.2 R132.P$1 U44.2
GND44: C89.2 C90.2 JP266.1 JP267.GND1 JP269.1 R134.2 R135.P$1 U45.2
GND45: C91.2 C92.2 JP272.1 JP273.GND1 JP275.1 R137.2 R138.P$1 U46.2
GND46: C93.2 C94.2 JP278.1 JP279.GND1 JP281.1 R140.2 R141.P$1 U47.2
GND47: C95.2 C96.2 JP284.1 JP285.GND1 JP287.1 R143.2 R144.P$1 U48.2
N$1: D1.A R2.1
N$2: D2.A R7.1
N$3: D11.A R3.1
N$4: D3.A R10.1
N$5: D4.A R13.1
N$6: D5.A R16.1
N$7: D6.A R19.1
N$8: D7.A R22.1
N$9: D8.A R25.1
N$10: D9.A R28.1
N$11: D10.A R31.1
N$12: D12.A R34.1
N$13: D13.A R37.1
N$14: D14.A R40.1
N$15: D15.A R43.1
N$16: D16.A R46.1
N$17: D17.A R49.1
N$18: D18.A R52.1
N$19: D19.A R55.1
N$20: D20.A R58.1
N$21: D21.A R61.1
N$22: D22.A R64.1
N$23: D23.A R67.1
N$24: D24.A R70.1
N$25: D25.A R73.1
N$26: D26.A R76.1
N$27: D27.A R79.1
N$28: D28.A R82.1
N$29: D29.A R85.1
N$30: D30.A R88.1
N$31: D31.A R91.1
N$32: D32.A R94.1
N$33: D33.A R97.1
N$34: D34.A R100.1
N$35: D35.A R103.1
N$36: D36.A R106.1
N$37: D37.A R109.1
N$38: D38.A R112.1
N$39: D39.A R115.1
N$40: D40.A R118.1
N$41: D41.A R121.1
N$42: D42.A R124.1
N$43: D43.A R127.1
N$44: D44.A R130.1
N$45: D45.A R133.1
N$46: D46.A R136.1
N$47: D47.A R139.1
N$48: D48.A R142.1
PROG: R1.P$2 R4.1 U1.5
PROG1: R5.1 R6.P$2 U2.5
PROG2: R8.1 R9.P$2 U3.5
PROG3: R11.1 R12.P$2 U4.5
PROG4: R14.1 R15.P$2 U5.5
PROG5: R17.1 R18.P$2 U6.5
PROG6: R20.1 R21.P$2 U7.5
PROG7: R23.1 R24.P$2 U8.5
PROG8: R26.1 R27.P$2 U9.5
PROG9: R29.1 R30.P$2 U10.5
PROG10: R32.1 R33.P$2 U11.5
PROG11: R35.1 R36.P$2 U12.5
PROG12: R38.1 R39.P$2 U13.5
PROG13: R41.1 R42.P$2 U14.5
PROG14: R44.1 R45.P$2 U15.5
PROG15: R47.1 R48.P$2 U16.5
PROG16: R50.1 R51.P$2 U17.5
PROG17: R53.1 R54.P$2 U18.5
PROG18: R56.1 R57.P$2 U19.5
PROG19: R59.1 R60.P$2 U20.5
PROG20: R62.1 R63.P$2 U21.5
PROG21: R65.1 R66.P$2 U22.5
PROG22: R68.1 R69.P$2 U23.5
PROG23: R71.1 R72.P$2 U24.5
PROG24: R74.1 R75.P$2 U25.5
PROG25: R77.1 R78.P$2 U26.5
PROG26: R80.1 R81.P$2 U27.5
PROG27: R83.1 R84.P$2 U28.5
PROG28: R86.1 R87.P$2 U29.5
PROG29: R89.1 R90.P$2 U30.5
PROG30: R92.1 R93.P$2 U31.5
PROG31: R95.1 R96.P$2 U32.5
PROG32: R98.1 R99.P$2 U33.5
PROG33: R101.1 R102.P$2 U34.5
PROG34: R104.1 R105.P$2 U35.5
PROG35: R107.1 R108.P$2 U36.5
PROG36: R110.1 R111.P$2 U37.5
PROG37: R113.1 R114.P$2 U38.5
PROG38: R116.1 R117.P$2 U39.5
PROG39: R119.1 R120.P$2 U40.5
PROG40: R122.1 R123.P$2 U41.5
PROG41: R125.1 R126.P$2 U42.5
PROG42: R128.1 R129.P$2 U43.5
PROG43: R131.1 R132.P$2 U44.5
PROG44: R134.1 R135.P$2 U45.5
PROG45: R137.1 R138.P$2 U46.5
PROG46: R140.1 R141.P$2 U47.5
PROG47: R143.1 R144.P$2 U48.5
STAT: D11.C U1.1
STAT1: D1.C U2.1
STAT2: D2.C U3.1
STAT3: D3.C U4.1
STAT4: D4.C U5.1
STAT5: D5.C U6.1
STAT6: D6.C U7.1
STAT7: D7.C U8.1
STAT8: D8.C U9.1
STAT9: D9.C U10.1
STAT10: D10.C U11.1
STAT11: D12.C U12.1
STAT12: D13.C U13.1
STAT13: D14.C U14.1
STAT14: D15.C U15.1
STAT15: D16.C U16.1
STAT16: D17.C U17.1
STAT17: D18.C U18.1
STAT18: D19.C U19.1
STAT19: D20.C U20.1
STAT20: D21.C U21.1
STAT21: D22.C U22.1
STAT22: D23.C U23.1
STAT23: D24.C U24.1
STAT24: D25.C U25.1
STAT25: D26.C U26.1
STAT26: D27.C U27.1
STAT27: D28.C U28.1
STAT28: D29.C U29.1
STAT29: D30.C U30.1
STAT30: D31.C U31.1
STAT31: D32.C U32.1
STAT32: D33.C U33.1
STAT33: D34.C U34.1
STAT34: D35.C U35.1
STAT35: D36.C U36.1
STAT36: D37.C U37.1
STAT37: D38.C U38.1
STAT38: D39.C U39.1
STAT39: D40.C U40.1
STAT40: D41.C U41.1
STAT41: D42.C U42.1
STAT42: D43.C U43.1
STAT43: D44.C U44.1
STAT44: D45.C U45.1
STAT45: D46.C U46.1
STAT46: D47.C U47.1
STAT47: D48.C U48.1
VCC: C4.1 JP1.2 JP8.2 U1.3
VCC1: C2.1 JP6.2 JP11.2 U2.3
VCC2: C6.1 JP14.2 JP17.2 U3.3
VCC3: C8.1 JP20.2 JP23.2 U4.3
VCC4: C10.1 JP26.2 JP29.2 U5.3
VCC5: C12.1 JP32.2 JP35.2 U6.3
VCC6: C14.1 JP38.2 JP41.2 U7.3
VCC7: C16.1 JP44.2 JP47.2 U8.3
VCC8: C18.1 JP50.2 JP53.2 U9.3
VCC9: C20.1 JP56.2 JP59.2 U10.3
VCC10: C22.1 JP62.2 JP65.2 U11.3
VCC11: C24.1 JP68.2 JP71.2 U12.3
VCC12: C26.1 JP74.2 JP77.2 U13.3
VCC13: C28.1 JP80.2 JP83.2 U14.3
VCC14: C30.1 JP86.2 JP89.2 U15.3
VCC15: C32.1 JP92.2 JP95.2 U16.3
VCC16: C34.1 JP98.2 JP101.2 U17.3
VCC17: C36.1 JP104.2 JP107.2 U18.3
VCC18: C38.1 JP110.2 JP113.2 U19.3
VCC19: C40.1 JP116.2 JP119.2 U20.3
VCC20: C42.1 JP122.2 JP125.2 U21.3
VCC21: C44.1 JP128.2 JP131.2 U22.3
VCC22: C46.1 JP134.2 JP137.2 U23.3
VCC23: C48.1 JP140.2 JP143.2 U24.3
VCC24: C50.1 JP146.2 JP149.2 U25.3
VCC25: C52.1 JP152.2 JP155.2 U26.3
VCC26: C54.1 JP158.2 JP161.2 U27.3
VCC27: C56.1 JP164.2 JP167.2 U28.3
VCC28: C58.1 JP170.2 JP173.2 U29.3
VCC29: C60.1 JP176.2 JP179.2 U30.3
VCC30: C62.1 JP182.2 JP185.2 U31.3
VCC31: C64.1 JP188.2 JP191.2 U32.3
VCC32: C66.1 JP194.2 JP197.2 U33.3
VCC33: C68.1 JP200.2 JP203.2 U34.3
VCC34: C70.1 JP206.2 JP209.2 U35.3
VCC35: C72.1 JP212.2 JP215.2 U36.3
VCC36: C74.1 JP218.2 JP221.2 U37.3
VCC37: C76.1 JP224.2 JP227.2 U38.3
VCC38: C78.1 JP230.2 JP233.2 U39.3
VCC39: C80.1 JP236.2 JP239.2 U40.3
VCC40: C82.1 JP242.2 JP245.2 U41.3
VCC41: C84.1 JP248.2 JP251.2 U42.3
VCC42: C86.1 JP254.2 JP257.2 U43.3
VCC43: C88.1 JP260.2 JP263.2 U44.3
VCC44: C90.1 JP266.2 JP269.2 U45.3
VCC45: C92.1 JP272.2 JP275.2 U46.3
VCC46: C94.1 JP278.2 JP281.2 U47.3
VCC47: C96.1 JP284.2 JP287.2 U48.3
VIN: C3.1 JP9.VBUS1 R3.2 U1.4
VIN1: C1.1 JP7.VBUS1 R2.2 U2.4
VIN2: C5.1 JP15.VBUS1 R7.2 U3.4
VIN3: C7.1 JP21.VBUS1 R10.2 U4.4
VIN4: C9.1 JP27.VBUS1 R13.2 U5.4
VIN5: C11.1 JP33.VBUS1 R16.2 U6.4
VIN6: C13.1 JP39.VBUS1 R19.2 U7.4
VIN7: C15.1 JP45.VBUS1 R22.2 U8.4
VIN8: C17.1 JP51.VBUS1 R25.2 U9.4
VIN9: C19.1 JP57.VBUS1 R28.2 U10.4
VIN10: C21.1 JP63.VBUS1 R31.2 U11.4
VIN11: C23.1 JP69.VBUS1 R34.2 U12.4
VIN12: C25.1 JP75.VBUS1 R37.2 U13.4
VIN13: C27.1 JP81.VBUS1 R40.2 U14.4
VIN14: C29.1 JP87.VBUS1 R43.2 U15.4
VIN15: C31.1 JP93.VBUS1 R46.2 U16.4
VIN16: C33.1 JP99.VBUS1 R49.2 U17.4
VIN17: C35.1 JP105.VBUS1 R52.2 U18.4
VIN18: C37.1 JP111.VBUS1 R55.2 U19.4
VIN19: C39.1 JP117.VBUS1 R58.2 U20.4
VIN20: C41.1 JP123.VBUS1 R61.2 U21.4
VIN21: C43.1 JP129.VBUS1 R64.2 U22.4
VIN22: C45.1 JP135.VBUS1 R67.2 U23.4
VIN23: C47.1 JP141.VBUS1 R70.2 U24.4
VIN24: C49.1 JP147.VBUS1 R73.2 U25.4
VIN25: C51.1 JP153.VBUS1 R76.2 U26.4
VIN26: C53.1 JP159.VBUS1 R79.2 U27.4
VIN27: C55.1 JP165.VBUS1 R82.2 U28.4
VIN28: C57.1 JP171.VBUS1 R85.2 U29.4
VIN29: C59.1 JP177.VBUS1 R88.2 U30.4
VIN30: C61.1 JP183.VBUS1 R91.2 U31.4
VIN31: C63.1 JP189.VBUS1 R94.2 U32.4
VIN32: C65.1 JP195.VBUS1 R97.2 U33.4
VIN33: C67.1 JP201.VBUS1 R100.2 U34.4
VIN34: C69.1 JP207.VBUS1 R103.2 U35.4
VIN35: C71.1 JP213.VBUS1 R106.2 U36.4
VIN36: C73.1 JP219.VBUS1 R109.2 U37.4
VIN37: C75.1 JP225.VBUS1 R112.2 U38.4
VIN38: C77.1 JP231.VBUS1 R115.2 U39.4
VIN39: C79.1 JP237.VBUS1 R118.2 U40.4
VIN40: C81.1 JP243.VBUS1 R121.2 U41.4
VIN41: C83.1 JP249.VBUS1 R124.2 U42.4
VIN42: C85.1 JP255.VBUS1 R127.2 U43.4
VIN43: C87.1 JP261.VBUS1 R130.2 U44.4
VIN44: C89.1 JP267.VBUS1 R133.2 U45.4
VIN45: C91.1 JP273.VBUS1 R136.2 U46.4
VIN46: C93.1 JP279.VBUS1 R139.2 U47.4
VIN47: C95.1 JP285.VBUS1 R142.2 U48.4